# Altium PCB PCB1.PcbDoc
Units mil, origin at the board's own origin, x right, y up, seen from the top; angles counter-clockwise.
Board outline 1411.86 x 1442.8 mil, 4 copper layers (Top Layer, GND, Sign, Bottom Layer), stack 74.06 mil thick; 76 components, 64 nets, 335 pads, 393 vias.
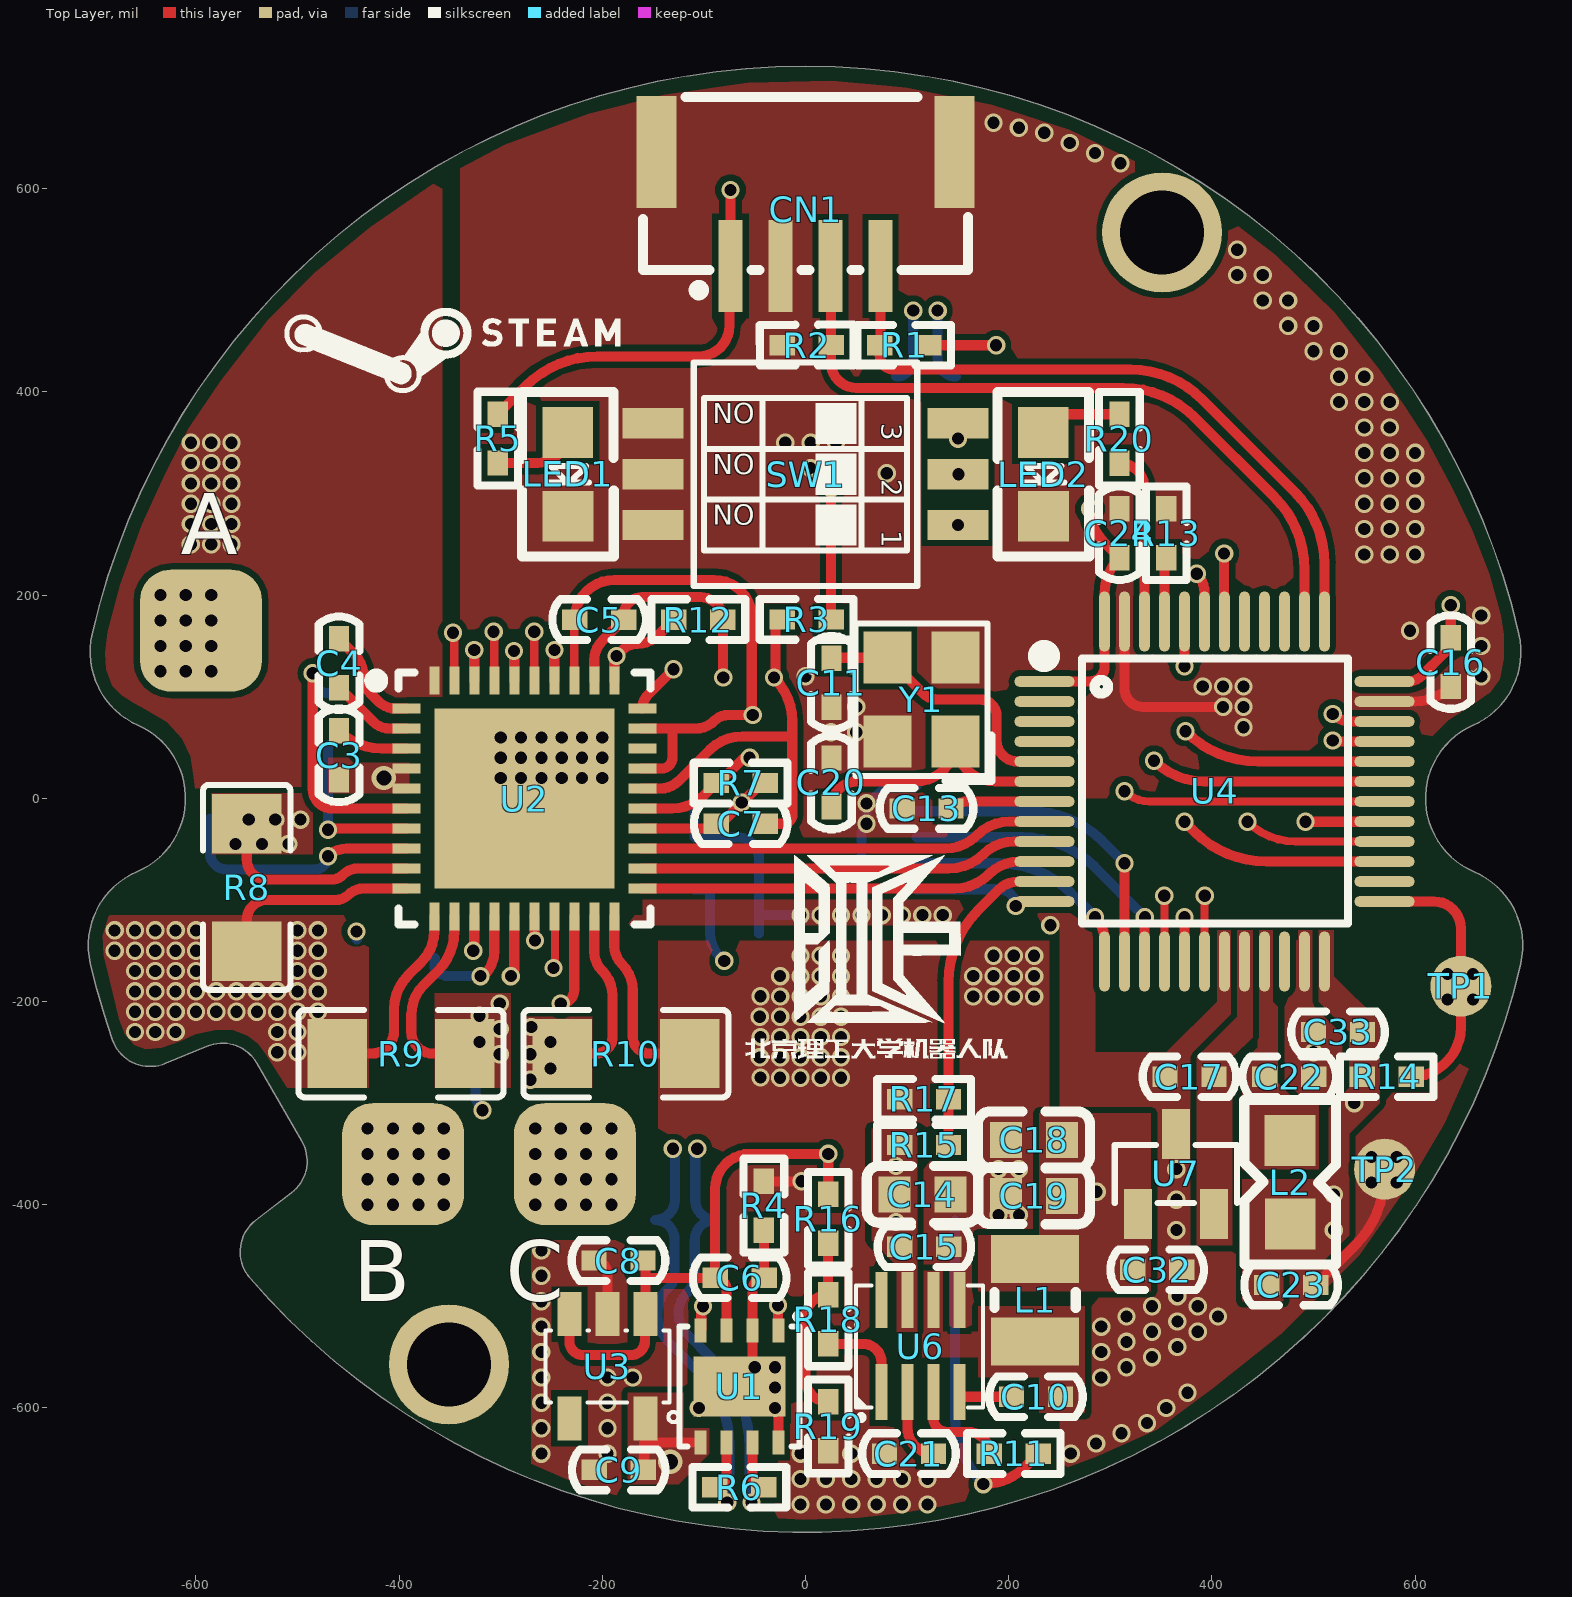
[diagram p0: Top Layer view]
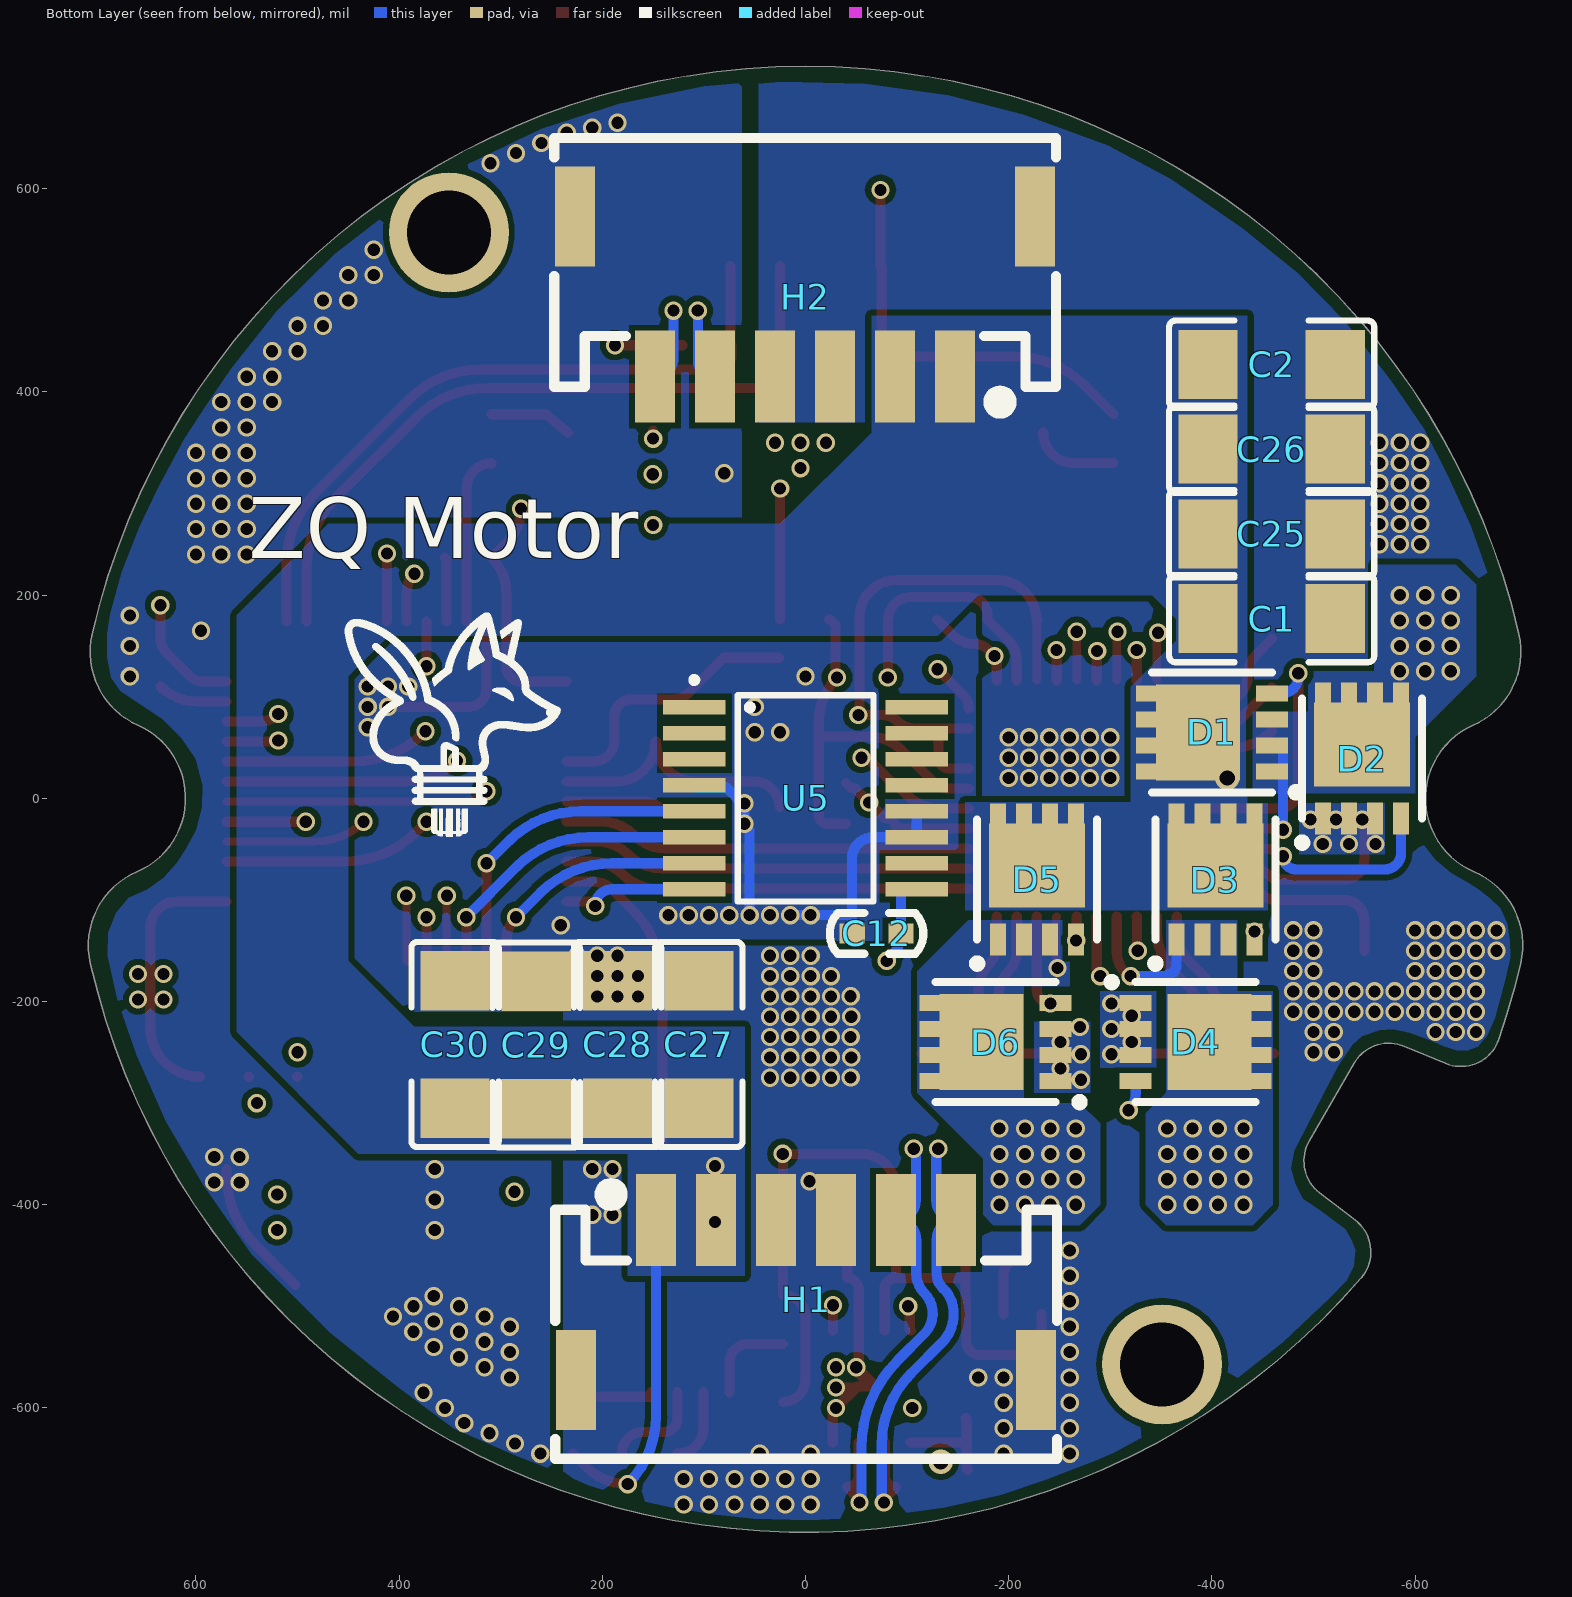
[diagram p1: Bottom Layer view, seen from below]
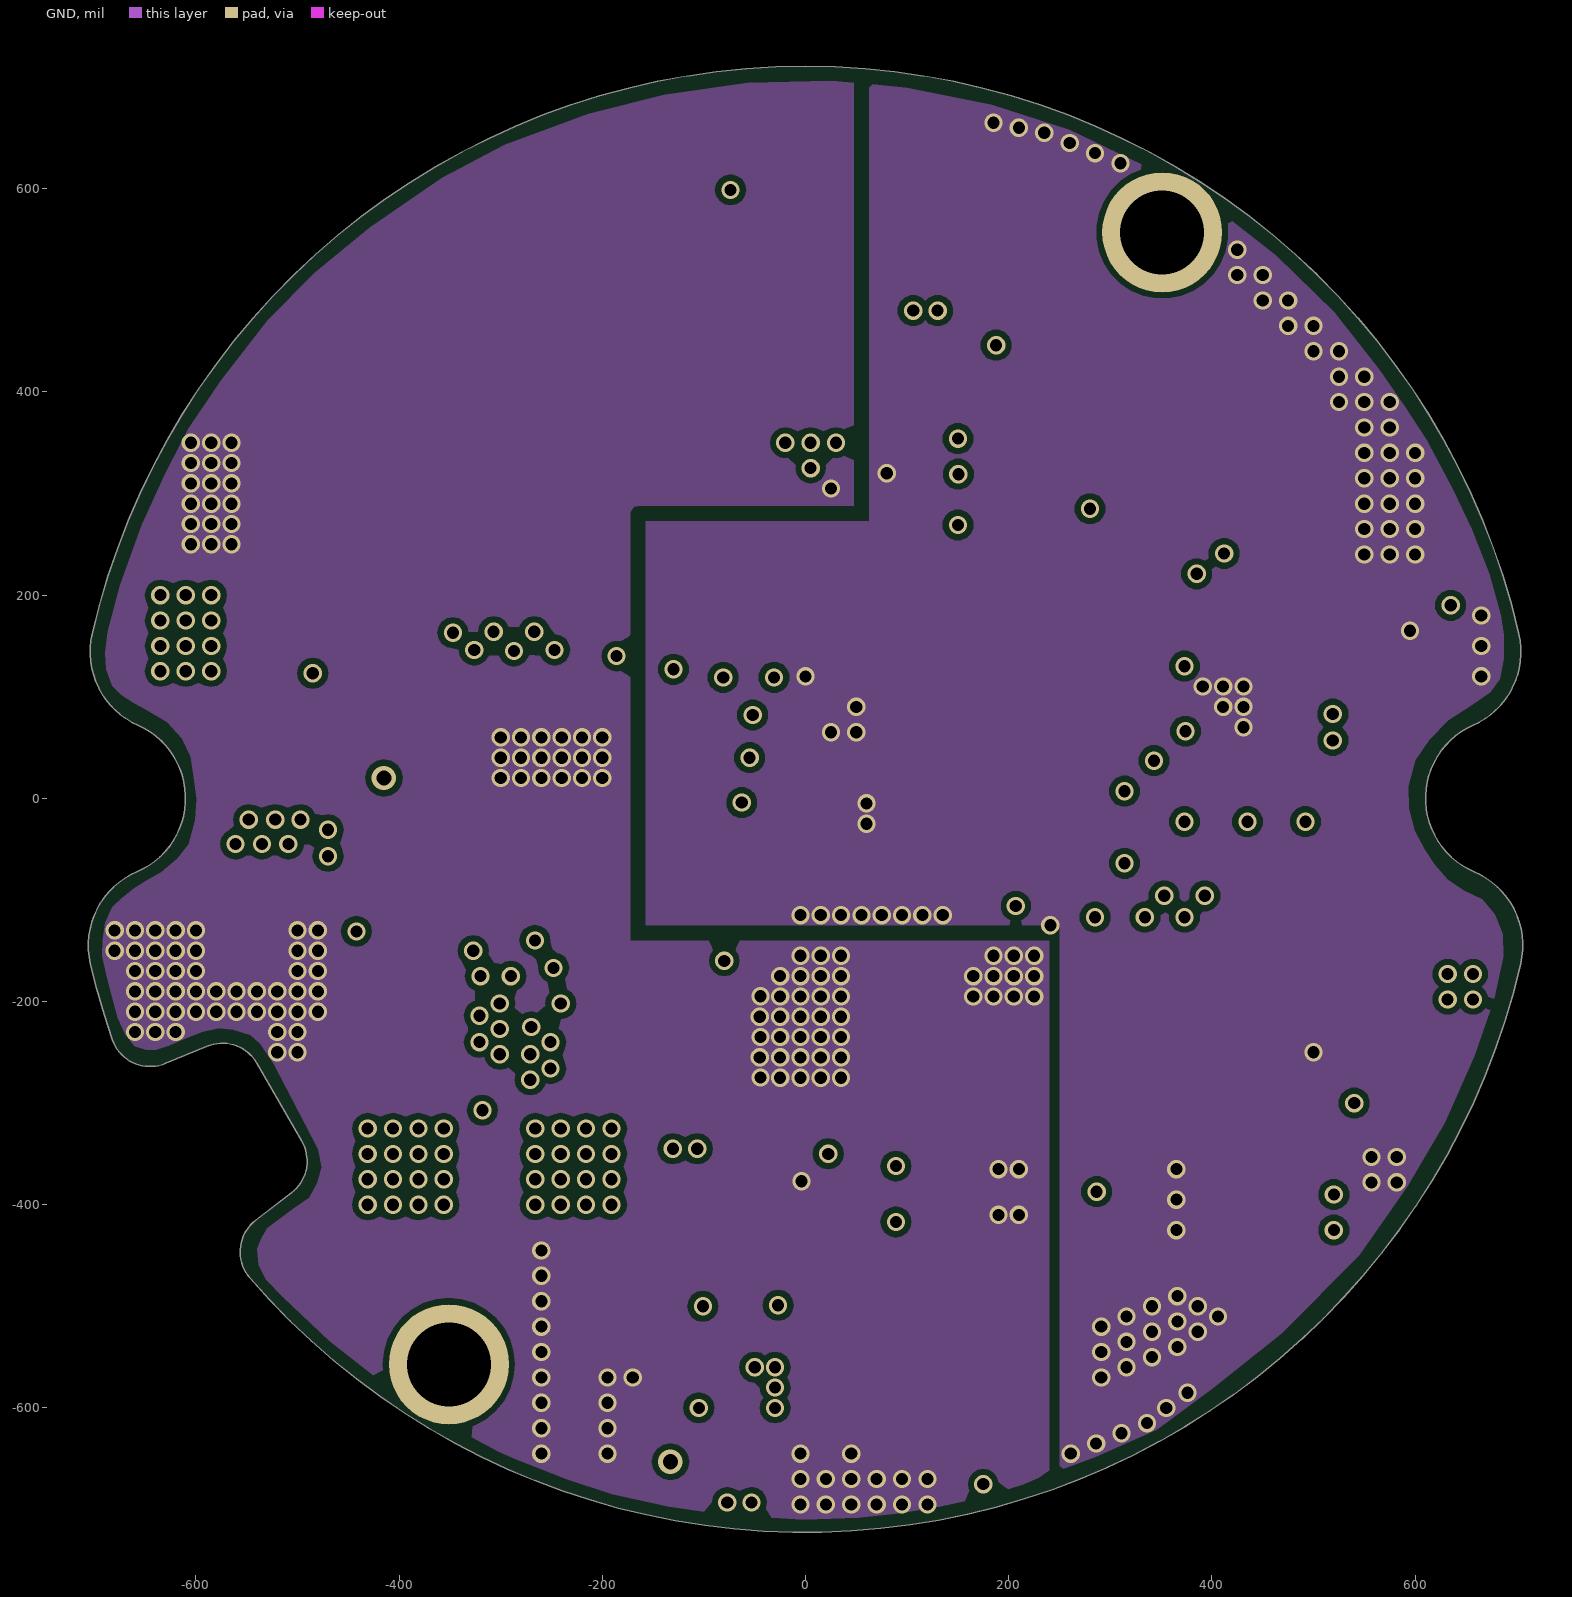
[diagram p2: GND]
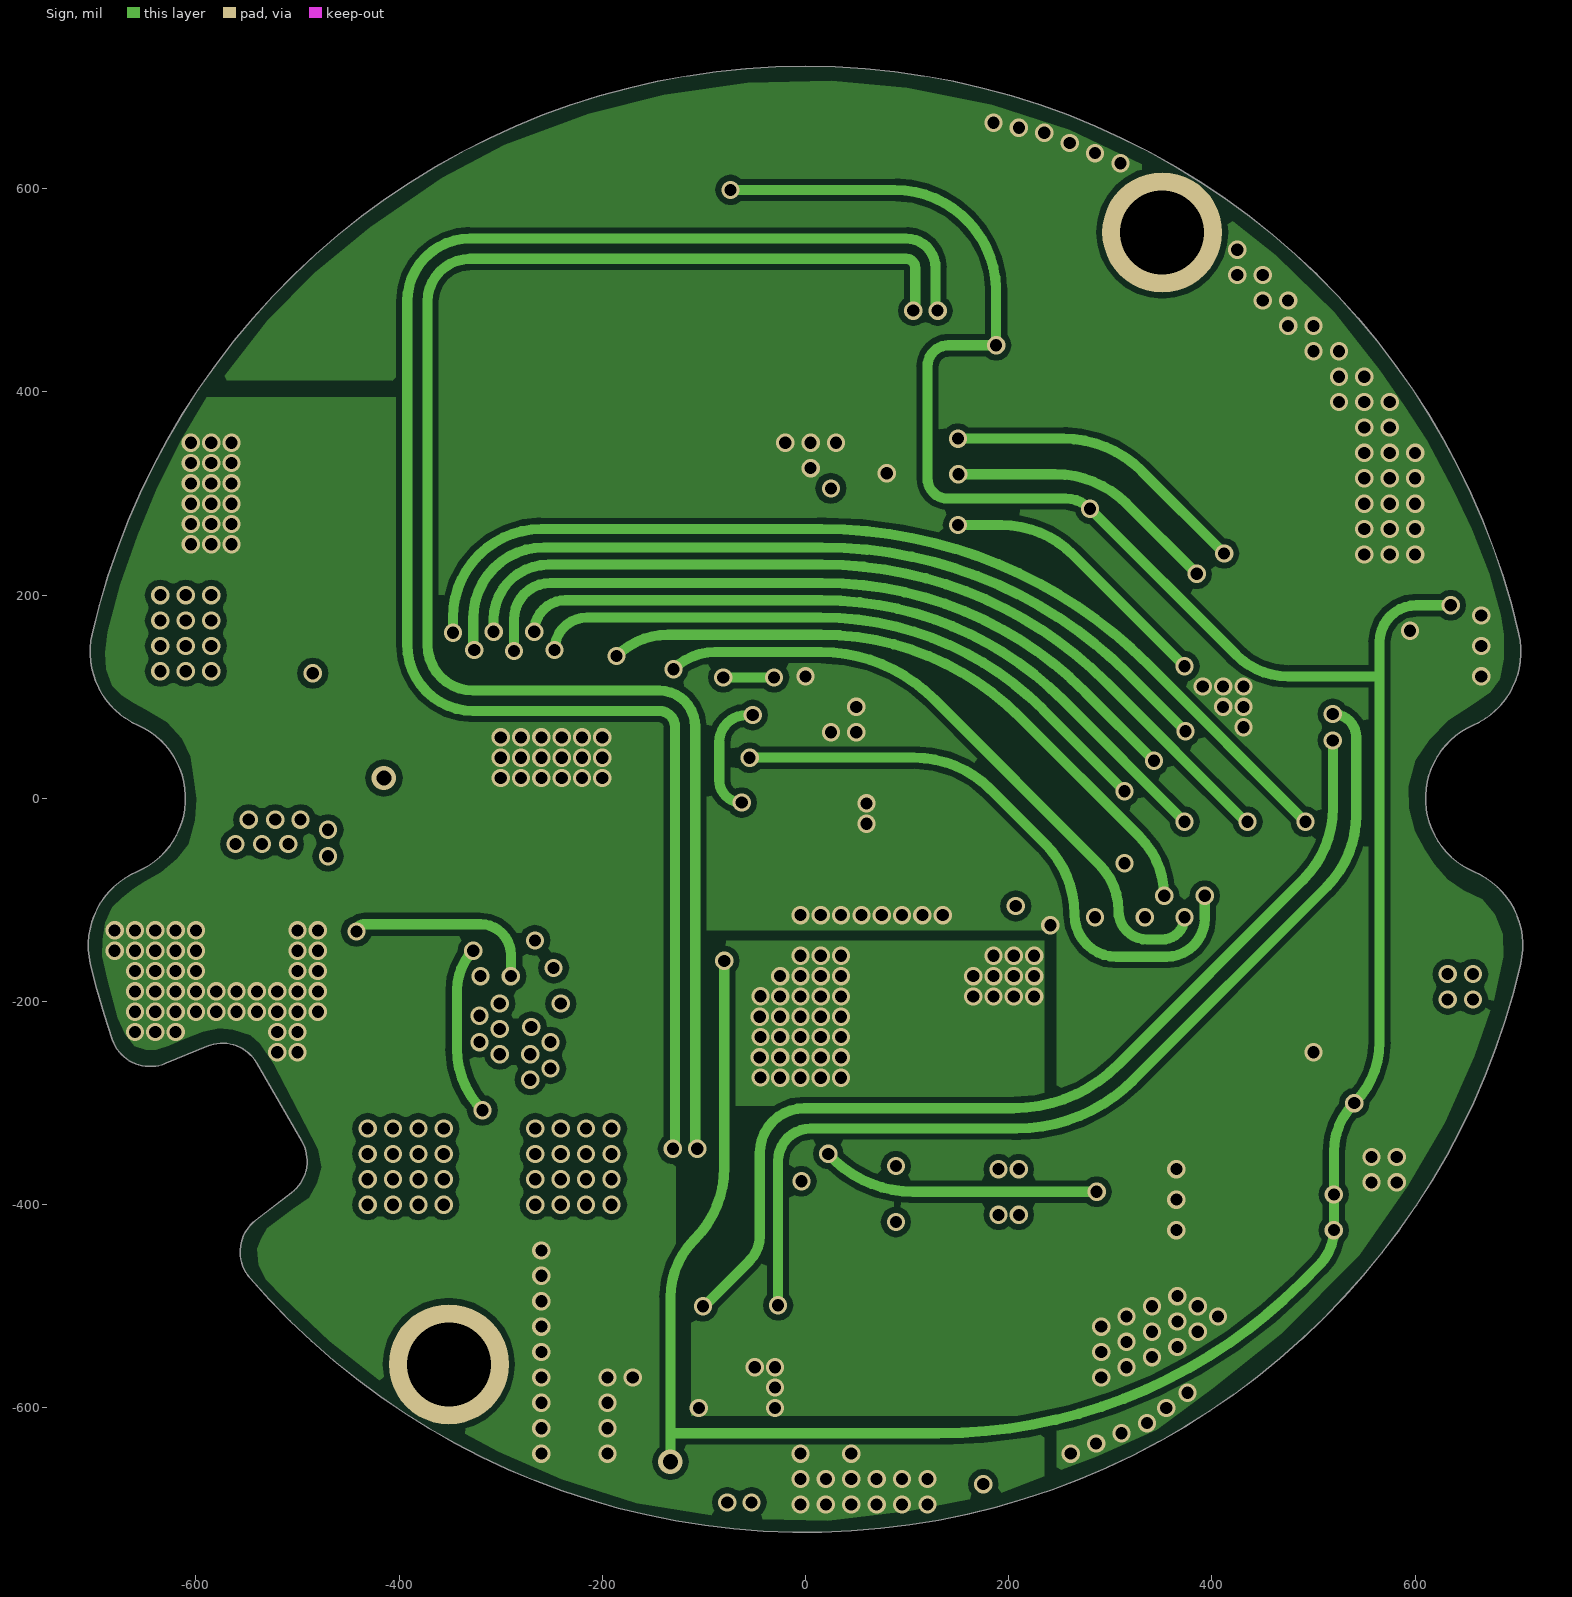
[diagram p3: Sign]
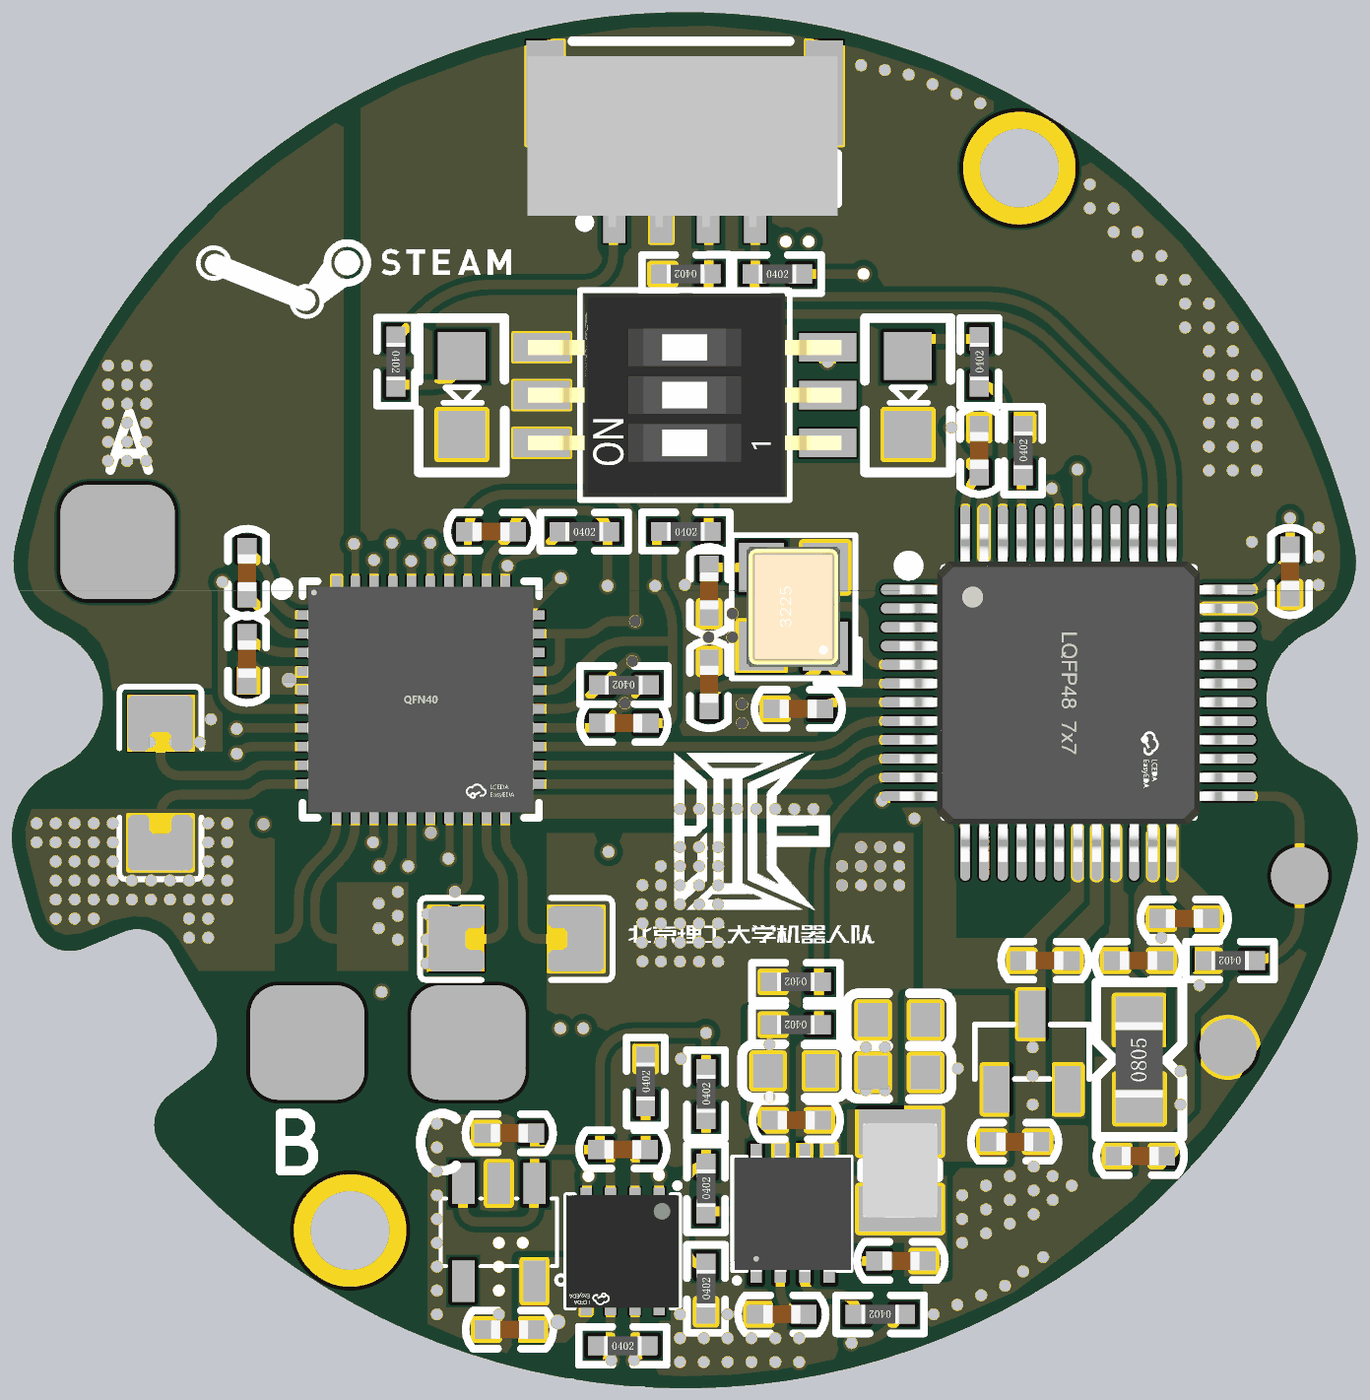
[diagram p4: 3D render of the assembled board from above, using the file's embedded part models]
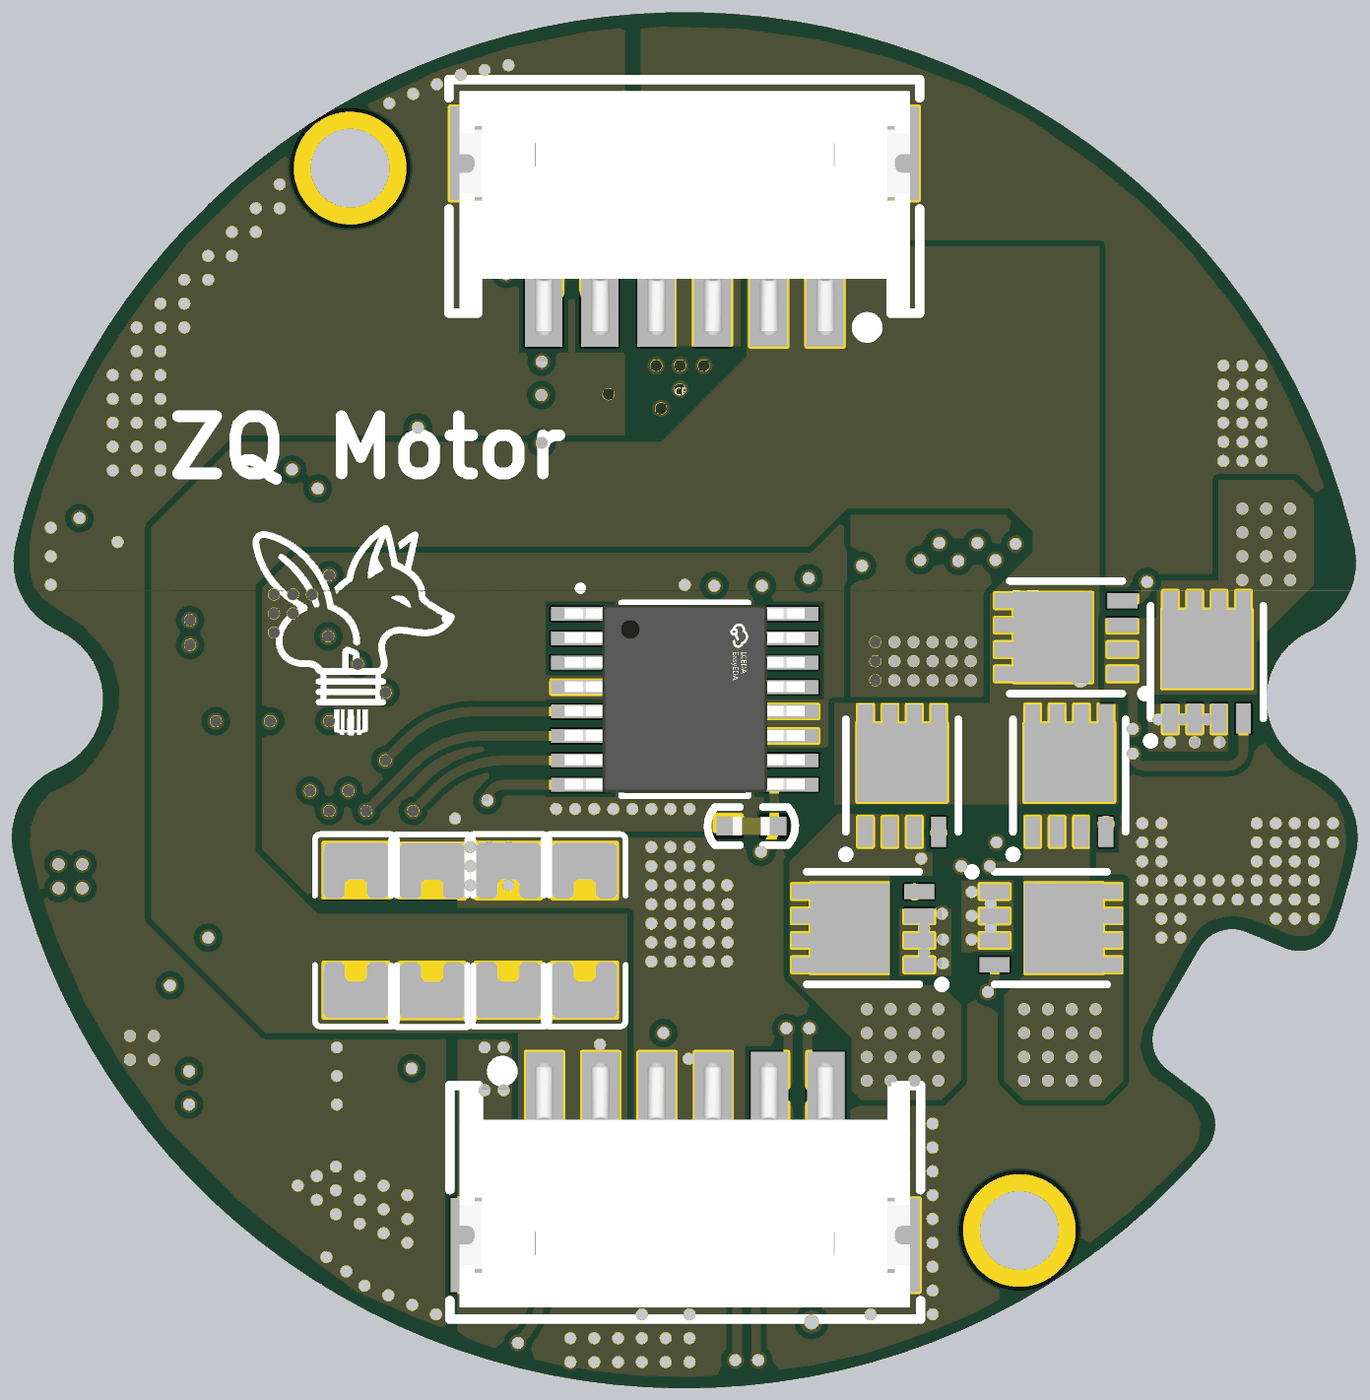
[diagram p5: 3D render of the assembled board from below, using the file's embedded part models]

## Layer stack, top to bottom
Top Solder: solder mask 0.4, Solder Resist, Dk 3.5
Top Layer: signal copper 1.4
Dielectric 2: prepreg 10.6299, PP-006, Dk 4.1
GND: signal copper 1.378
Dielectric 1: dielectric 47.244, FR-4, Dk 4.8
Sign: signal copper 1.378
Dielectric 3: prepreg 10.6299, PP-006, Dk 4.1
Bottom Layer: signal copper 1.4
Bottom Solder: solder mask 0.4, Solder Resist, Dk 3.5

## Board outline
-546.84,-472.1 cw(c-517.04,-446.38) -541.01,-415.14 -505.93,-388.23 ccw(c-529.9,-356.99) -495.81,-337.31 -540.02,-260.73 ccw(c-574.11,-280.41) -589.18,-244.04 -630.03,-260.96 cw(c-645.1,-224.58) -682.28,-237.53 cw(c0,0) -703.91,-162.57 cw(c-627.19,-144.85) -658.08,-72.43 ccw(c-688.98,0) -657.17,72.03 cw(c-625.35,144.06) -702.08,161.73 cw(c0,0) 702.08,161.73 cw(c625.35,144.06) 657.17,72.03 ccw(c688.98,0) 658.08,-72.43 cw(c627.19,-144.85) 703.91,-162.57 cw(c0,0)

## Design rules (kind name [scope] priority, off if disabled: settings)
Clearance [All] p1: gap=6 ignorepadtopadclearanceinfootprint=FALSE except(0: Arc-Hole Track-Hole SMDPad-Hole THPad-Hole Via-Hole Fill-Hole Poly-Hole Region-Hole Text-Hole)
DiffPairsRouting [All] p1: maxlimit=10 minlimit=10 mostfreqgap=10 toplayer_minwidth=8 toplayer_maxwidth=15 toplayer_prefwidth=10 midlayer1_minwidth=8 midlayer1_maxwidth=15 midlayer1_prefwidth=10 midlayer2_minwidth=8 midlayer2_maxwidth=15 midlayer2_prefwidth=10 bottomlayer_minwidth=8 bottomlayer_maxwidth=15 bottomlayer_prefwidth=10 maxuncoupledlength=500
HoleSize [All] p1: absolutevalues=TRUE maxlimit=10000 minlimit=1 maxpercent=80.000 minpercent=20.000
HoleToHoleClearance [All] p1: gap=0 allowstackedmicrovias=TRUE
MinimumSolderMaskSliver [All] p1: minsoldermaskwidth=0
PlaneClearance [All] p1: clearance=6
PlaneConnect [All] p1: planeconnectstyle=Direct reliefexpansion=20 reliefentries=4 reliefconductorwidth=10 reliefairgap=10
PolygonConnect [All] p1: connectstyle=Direct reliefconductorwidth=10 reliefentries=4 polygonreliefangle="90 Angle" airgapwidth=10
RoutingVias [All] p1: holewidth=12 width=18 viastyle="Through Hole" minholewidth=12 minwidth=18 maxholewidth=28 maxwidth=50
SilkToSilkClearance [All] p1: silktosilkclearance=0
SilkToSolderMaskClearance [IsPad] p1: minsilkscreentomaskgap=0 clearancetoexposedcopper=TRUE
SolderMaskExpansion [All] p1: expansion=4 istentingtop=FALSE
Width [All] p1: maxlimit=20 minlimit=8 preferedwidth=10
22 further rules are at their usual default settings.

## Classes and differential pairs
differential pair CAN: +CAN_P -CAN_N

## Components (designator, comment, footprint, x,y, rotation, side; value= is the part's Value field where it differs from the comment)
C1 "100uF" 1206 -1049.75,159.95 r0 bottom
C2 "100uF" 1206 -1049.75,410.11 r0 bottom
C3 "1uF" c0402 -459.14,66.35 r270 top
C4 "47nF" c0402 -459.14,156.97 r270 top
C5 "1uF" c0402 -179.05,175.88 r180 top
C6 "0.1uF" c0402 -40.8,-472 r180 top
C7 "0.1uF" c0402 -39.8,-25 r180 top
C8 "10uF" c0402 -208.2,-455 r0 top
C9 "10uF" c0402 -208,-661 r0 top
C10 "100nF" c0402 202.73,-588.97 r0 top
C11 "15pF" c0402 25.54,137.9 r270 top
C12 "100nF" C0402 -94,-133 r0 bottom
C13 "0.1uF" c0402 143.2,-10 r180 top
C14 "10uF" C0603 730.24,-301.82 r180 top
C15 "100nF" c0402 141.13,-441.45 r180 top
C16 "0.1uF" c0402 635,158.2 r270 top
C17 "0.1uF" c0402 402,-274 r180 top
C18 "10uF" C0603 -390.24,-424.25 r0 top
C19 "10uF" C0603 -390.24,-479.25 r0 top
C20 "15pF" c0402 25.54,-8.5 r90 top
C21 "100nF" c0402 77.73,-644.97 r0 top
C22 "0.1uF" c0402 500.2,-274 r180 top
C23 "0.1uF" c0402 502,-479 r180 top
C24 "0.1uF" c0402 309,236.8 r90 top
C25 "100uF" 1206 -1049.75,243.34 r0 bottom
C26 "100uF" 1206 -1049.75,326.73 r0 bottom
C27 "100uF" 1206 88.02,348.63 r270 bottom
C28 "100uF" 1206 168.02,348.63 r270 bottom
C29 "100uF" 1206 248.02,348.23 r270 bottom
C30 "100uF" 1206 328.02,348.63 r270 bottom
C32 "0.1uF" c0402 322,-464 r0 top
C33 "0.1uF" c0402 500,-230 r0 top
CN1 "卧式STLINK" CONN-SMD_4P-P1.25_GH1.25-4P 0,580 r180 top locked
D1 "NTMFS5C410NL" DFN-8_L3.0-W3.0-P0.65-BL -400,65 r90 bottom
D2 "NTMFS5C410NL" DFN-8_L3.0-W3.0-P0.65-BL -547.79,39.06 r180 bottom
D3 "NTMFS5C410NL" DFN-8_L3.0-W3.0-P0.65-BL -403.39,-80 r180 bottom
D4 "NTMFS5C410NL" DFN-8_L3.0-W3.0-P0.65-BL -384,-240 r270 bottom
D5 "NTMFS5C410NL" DFN-8_L3.0-W3.0-P0.65-BL -228,-80 r180 bottom
D6 "NTMFS5C410NL" DFN-8_L3.0-W3.0-P0.65-BL -187,-240 r90 bottom
H1 "卧式XH1.5 6PIN" CONN-SMD_6P-P1.50_ZX-ZH1.5-6PWT 0,-510 r180 bottom locked
H2 "卧式XH1.5 6PIN" CONN-SMD_6P-P1.50_ZX-ZH1.5-6PWT 0,510 r0 bottom locked
L1 "22uH" IND-SMD_L2.5-W2.0 225.93,-493.97 r270 top value=10uH
L2 "10μH" L0805 477,-419 r90 top
LED1 "LED" led0805 -234,360 r270 top
LED2 "LED" led0805 234,360 r270 top
R1 "10KΩ" R0402 73,446 r0 top
R2 "10KΩ" R0402 25.2,446.18 r180.21 top
R3 "0Ω" R0402 -23,176 r0 top
R4 "0Ω" R0402 -41,-425 r90 top
R5 "2KΩ" R0402 -303,378.2 r270 top
R6 "120Ω" R0402 -89.2,-678 r0 top
R7 "10KΩ" R0402 -39.8,15 r180 top
R8 "30mR" 1206 -566.98,-678.63 r90 top
R9 "30mR" 1206 -989.09,-234.31 r0 top
R10 "30mR" 1206 414.17,-268.28 r180 top
R11 "10KΩ" R0402 229.13,-644.97 r180 top
R12 "200KΩ" R0402 -129.55,175.88 r0 top
R13 "10KΩ" R0402 355,236.8 r90 top
R14 "2KΩ" R0402 596.2,-274 r180 top
R15 "10KΩ" R0402 140.74,-341.3 r180 top
R16 "43KΩ" R0402 22.26,-437.97 r90 top
R17 "1KΩ" R0402 140.74,-296.3 r180 top
R18 "51KΩ" R0402 22.26,-536.97 r90 top
R19 "8.2KΩ" R0402 22.26,-642.26 r90 top
R20 "2KΩ" R0402 309,329.8 r90 top
SW1 "DSHP03TSGER" SW-SMD_6P-L5.4-W5.4-P1.27-LS8.4 0,319 r90 top locked
TP1 "testpoint" testpoint 645,-185 r270 top
TP2 "testpoint" testpoint 570,-365 r0 top
U1 "SIT1057QTK/3" DFN-8_L3.0-W3.0-P0.65-BL-EP -65.1,-578.97 r180 top
U2 "DRV8323HRTAR" QFN-40_L6.0-W6.0-P0.50-BL-EP4.5 -276.83,-0.24 r270 top
U3 "XC6201P332MR-HXY" SOT-23-5_L3.0-W1.7-P0.95-LS2.8-BR -195,-559 r90 top
U4 "STM32G474CET6_1" LQFP-48_L7.0-W7.0-P0.50-LS9.0-BL 402.54,6.7 r270 top
U5 "MT6825GT-STD" TSSOP-16_L5.0-W4.4-P0.65-LS6.4-BL-1 0,0 r270 bottom locked
U6 "MP9943" "QFN-8 3x3" 74.75,-584.52 r90 top
U7 "REF3133AIDBZR" SOT-23-3_L2.9-W1.3-P1.90-LS2.4-BR 519.31,-150.65 r270 top
Y1 "3225贴片晶振" OSC-3225-4P 114,97.04 r90 top value=16M

## Footprints (in the part's own frame and the unit in brackets; to place one, negate y for a bottom-side part, rotate by r counter-clockwise, add the part's x,y. Pads: shape width x height; smd on the part's side, far side on the other; paste and mask are expansions set on the pad)
1206 [mm]
  rect 1.485x1.728 smd paste-100 mask+0.051: 1(13.417,-0.431) 2(16.602,-0.431)
  silkscreen extent 12.45,-1.52 17.57,0.66, body extent 13.41,-1.24 16.61,0.38, height 1.11
c0402 [mil]
  rect 25x20 smd: 1(0,0) 2(48.2,0)
  silkscreen extent -22,-20 70,20, body extent 5,-10 44,10, height 20
C0402 [mil]
  rect 25x20 smd: 1(0,0) 2(48.2,0)
  silkscreen extent -22,-20 70,20, body extent 5,-10 44,10, height 20
C0603 [mm]
  rect 0.8x0.9 smd: 1(14.93,2.234) 2(16.33,2.234)
  silkscreen extent 14.22,1.52 17.02,2.95, body extent 14.82,1.84 16.42,2.64, height 0.78
CONN-SMD_4P-P1.25_GH1.25-4P [mm]
  rect 0.6x2.3 smd mask+0.051: 1(1.875,1.425) 2(0.625,1.425) 3(-0.625,1.425) 4(-1.875,1.425)
  rect 1x2.8 smd mask+0.051: 5(-3.725,-1.425) 6(3.725,-1.425)
  silkscreen extent -4.06,-2.8 4.06,2.16, body extent -4.07,-2.4 4.19,2.15, height 4.13
CONN-SMD_6P-P1.50_ZX-ZH1.5-6PWT [mm]
  rect 1x2.3 smd paste+0 mask+0.05: 1(-3.738,2.413) 2(-2.238,2.413) 3(-0.738,2.413) 4(0.762,2.413) 5(2.262,2.413) 6(3.762,2.413)
  rect 1x2.5 smd paste+0 mask+0.05: 7(5.762,-1.587) 8(-5.738,-1.587)
  silkscreen extent -6.26,-3.56 6.28,3.46, body extent -6,-3.25 6.01,3.25, height 3.78
DFN-8_L3.0-W3.0-P0.65-BL [mm]
  rect 0.4x0.8 smd paste-100 mask+0.051: D(-0.975,1.5) D(-0.325,1.5) D(0.325,1.5) D(0.975,1.5) G(0.975,-1.5) S(-0.975,-1.5) S(-0.325,-1.5) S(0.325,-1.5)
  rect 2.4x2.1 smd paste-100 mask+0.051: D(0,0.35)
  silkscreen extent -1.6,-2.2 1.5,1.5, body extent -1.55,-1.6 1.55,1.6, height 0.8
DFN-8_L3.0-W3.0-P0.65-BL-EP [mm]
  rect 0.3x0.6 smd paste+0 mask+0.05: 1(-0.975,-1.4) 2(-0.325,-1.4) 3(0.325,-1.4) 4(0.975,-1.4) 5(0.975,1.4) 6(0.325,1.4) 7(-0.325,1.4) 8(-0.975,1.4)
  rect 2.3x1.5 smd paste+0 mask+0.05: 9(0,0)
  silkscreen extent -1.51,-1.8 1.5,1.5, body extent -1.5,-1.5 1.5,1.5, height 1.01
IND-SMD_L2.5-W2.0 [mm]
  rect 1.2x2.2 smd: 1(1.028,0) 2(-1.028,0)
  silkscreen extent -0.2,-1.02 0.2,1.02, body extent -1.26,-1 1.26,1, height 1.2
L0805 [mil]
  rect 50x50 smd: 1(0,0) 2(82.3,0.2)
  silkscreen extent -40,-45 122,45, body extent 1,-24 80,25, height 22
led0805 [mil] "1/8W"
  rect 50x50 smd: 1(0,0) 2(82.3,0.2)
  silkscreen extent -40,-45 122,45, body extent 2,-25 80,25, height 20
LQFP-48_L7.0-W7.0-P0.50-LS9.0-BL [mm]
  oval 0.27x1.5 smd paste+0 mask+0.05: 1(-2.75,-4.25) 2(-2.25,-4.25) 3(-1.75,-4.25) 4(-1.25,-4.25) 5(-0.75,-4.25) 6(-0.25,-4.25) 7(0.25,-4.25) 8(0.75,-4.25) 9(1.25,-4.25) 10(1.75,-4.25) 11(2.25,-4.25) 12(2.75,-4.25) 25(2.75,4.25) 26(2.25,4.25) 27(1.75,4.25) 28(1.25,4.25) 29(0.75,4.25) 30(0.25,4.25) 31(-0.25,4.25) 32(-0.75,4.25) 33(-1.25,4.25) 34(-1.75,4.25) 35(-2.25,4.25) 36(-2.75,4.25)
  oval 1.5x0.27 smd paste+0 mask+0.05: 13(4.25,-2.75) 14(4.25,-2.25) 15(4.25,-1.75) 16(4.25,-1.25) 17(4.25,-0.75) 18(4.25,-0.25) 19(4.25,0.25) 20(4.25,0.75) 21(4.25,1.25) 22(4.25,1.75) 23(4.25,2.25) 24(4.25,2.75) 37(-4.25,2.75) 38(-4.25,2.25) 39(-4.25,1.75) 40(-4.25,1.25) 41(-4.25,0.75) 42(-4.25,0.25) 43(-4.25,-0.25) 44(-4.25,-0.75) 45(-4.25,-1.25) 46(-4.25,-1.75) 47(-4.25,-2.25) 48(-4.25,-2.75)
  silkscreen extent -3.59,-4.46 3.3,3.34, body extent -4.5,-4.5 4.5,4.5, height 1.45
OSC-3225-4P [mm] "3.2*2.5*0.7mm(长宽高)                             淘宝ID:黄晶宝石"
  rect 1.3x1.2 smd: 1(-1.05,-0.85) 2(1.05,-0.85) 3(1.05,0.85) 4(-1.05,0.85)
  silkscreen extent -2.03,-1.75 1.91,1.65, body extent -1.6,-1.25 1.6,1.25, height 0.7
"QFN-8 3x3" [mm]
  rect 1.4x0.3 smd: 1(0,0) 2(0,-0.65) 3(0,-1.3) 4(0,-1.95) 5(2.3,-1.95) 6(2.3,-1.3) 7(2.3,-0.65) 8(2.3,0)
  silkscreen extent -0.64,-2.54 2.67,0.64, body extent -0.41,-2.53 2.69,0.57, height 0.94
QFN-40_L6.0-W6.0-P0.50-BL-EP4.5 [mm]
  rect 0.25x0.7 smd paste-100 mask+0.051: 1(-2.25,-2.95) 2(-1.75,-2.95) 3(-1.25,-2.95) 4(-0.75,-2.95) 5(-0.25,-2.95) 6(0.25,-2.95) 7(0.75,-2.95) 8(1.25,-2.95) 9(1.75,-2.95) 10(2.25,-2.95) 21(2.25,2.95) 22(1.75,2.95) 23(1.25,2.95) 24(0.75,2.95) 25(0.25,2.95) 26(-0.25,2.95) 27(-0.75,2.95) 28(-1.25,2.95) 29(-1.75,2.95) 30(-2.25,2.95)
  rect 0.7x0.25 smd paste-100 mask+0.051: 11(2.95,-2.25) 12(2.95,-1.75) 13(2.95,-1.25) 14(2.95,-0.75) 15(2.95,-0.25) 16(2.95,0.25) 17(2.95,0.75) 18(2.95,1.25) 19(2.95,1.75) 20(2.95,2.25) 31(-2.95,2.25) 32(-2.95,1.75) 33(-2.95,1.25) 34(-2.95,0.75) 35(-2.95,0.25) 36(-2.95,-0.25) 37(-2.95,-0.75) 38(-2.95,-1.25) 39(-2.95,-1.75) 40(-2.95,-2.25)
  rect 4.5x4.5 smd paste-100 mask+0.051: 41(0,0)
  silkscreen extent -3.15,-3.85 3.15,3.15, body extent -3.01,-3.01 3.01,3.01, height 0.83
R0402 [mil] "1/16W"
  rect 25x20 smd: 1(0,0) 2(48.2,0)
  silkscreen extent -22,-20 70,20, body extent 5,-10 44,10, height 14
SOT-23-3_L2.9-W1.3-P1.90-LS2.4-BR [mm]
  rect 1.25x0.7 smd: 1(6.562,-4.885) 2(6.562,-2.985) 3(4.562,-3.935)
  silkscreen extent 4.84,-5.46 6.29,-2.41, body extent 4.19,-5.39 6.99,-2.49, height 1.3
SOT-23-5_L3.0-W1.7-P0.95-LS2.8-BR [mm]
  rect 1.1x0.6 smd: 1(1.3,-0.95) 2(1.3,0) 3(1.3,0.95) 4(-1.3,0.95) 5(-1.3,-0.95)
  silkscreen extent -1.4,-1.78 0.9,1.55, body extent -1.5,-1.5 1.5,1.5, height 1.3
SW-SMD_6P-L5.4-W5.4-P1.27-LS8.4 [mil]
  rect 30x60 smd paste+0 mask+2: 1(-50,-150) 2(0,-150) 3(50,-150) 4(50,150) 5(0,150) 6(-50,150)
  silkscreen extent -110,-110 110,110, body extent -106,-164 106,164, height 91
testpoint [mil]
  round 60 smd: 1(0,0)
TSSOP-16_L5.0-W4.4-P0.65-LS6.4-BL-1 [mm]
  rect 0.364x1.56 smd paste+0 mask+0.051: 1(-2.275,-2.78) 2(-1.625,-2.78) 3(-0.975,-2.78) 4(-0.325,-2.78) 5(0.325,-2.78) 6(0.975,-2.78) 7(1.625,-2.78) 8(2.275,-2.78) 9(2.275,2.78) 10(1.625,2.78) 11(0.975,2.78) 12(0.325,2.78) 13(-0.325,2.78) 14(-0.975,2.78) 15(-1.625,2.78) 16(-2.275,2.78)
  silkscreen extent -3.03,-2.85 2.58,1.7, body extent -2.51,-3.2 2.49,3.2, height 1.09

## Part data
C1 C2 C14 C18 C19 C25 C26 C27 C28 C29 C30: library part 1210贴片电容, "1210贴片电容"
C3 C4 C5 C6 C7 C8 C9 C10 C11 C12 C13 C15 C16 C17 C20 C21 C22 C23 C24 C32 C33: library part 0402贴片电容, "贴片电容0402"
D1 D2 D3 D4 D5 D6: "N沟道MOS管", ComponentLink1Description="Manufacturer Link", ComponentLink1URL=http://www.irf.com/, DatasheetVersion=PD-9.814, LatestRevisionDate=17-Jul-2002, LatestRevisionNote="Re-released for DXP Platform.", Note="Pin 2 is electrically connected to pin 4.", PackageDescription="TO, Thru-Hole, Vertical, Heatsink Mounted; 3 In-Line Leads; Pitch 2.54 mm", PackageReference=TO-220AB, PackageVersion=Feb-1997, Published=8-Jun-2000, Publisher="Altium Limited"
L1: library part 0530屏蔽电感, "一体成型屏蔽电感，0530封装，额定电流3A", DC Resistance (DCR)=125mΩ, JLCPCB Part Class="Extended Part", LCSC Part Name="10uH ±20% 3.5A", Manufacturer=XR(祥如), Manufacturer Part=XR0530-100M, Rated Current=3.2A, Saturation Current (Isat)=3.5A, Tolerance=±20%, Add into BOM=yes, Convert to PCB=yes, Datasheet=https://atta.szlcsc.com/upload/public/pdf/source/20240328/42FE63A3232C4AF7EB8F1CDEDD5FC69F.pdf, Device=XR0530-100M, Supplier=LCSC, Supplier Footprint=SMD,0530, Supplier Part=C5307602, Symbol=XR0530-100M, Type=一体成型电感
L2: library part 0805贴片电感, "0805贴片电感"
LED1 LED2: library part 0805贴片LED, "0805贴片LED"
R1 R2 R3 R4 R5 R6 R7 R11 R12 R13 R14 R15 R16 R17 R18 R19 R20: library part 0402贴片电阻, "0402贴片电阻"
R8 R9 R10: library part 2512检流电阻, "2512检流电阻"
U2: JLCPCB Part Class="Extended Part", LCSC Part Name="5mA 无刷直流BLDC电机驱动芯片 60V", Manufacturer=TI(德州仪器), Add into BOM=yes, Convert to PCB=yes, Datasheet=https://www.ti.com/cn/lit/gpn/drv8323, Device=DRV8323HRTAR, Manufacturer Part=DRV8323HRTAR, Supplier=LCSC, Supplier Footprint=QFN-40-EP(6x6), Supplier Part=C701783, Symbol=DRV8323HRTAR
U3: "3.3V LDO", JLCPCB Part Class="Extended Part", Manufacturer="HXY MOSFET(华轩阳电子)", MAX Output Current=300mA, Maximum Input Voltage=12V, Output Voltage=3.3V, Add into BOM=yes, Convert to PCB=yes, Datasheet=https://atta.szlcsc.com/upload/public/pdf/source/20231208/3D7EFECB06481ED5AED4680614D7FFF5.pdf, Device=XC6201P332MR-HXY, LCSC Part Name=XC6201P332MR-HXY, Manufacturer Part=XC6201P332MR-HXY, Output Polarity=正极, Output Type=固定, Supplier=LCSC, Supplier Footprint=SOT-23-5L, Supplier Part=C19626990, Symbol=XC6201P332MR-HXY
U5: "18位绝对角编码器"

## Free pads (board coordinates)
  round 118.11 hole 82.68: 4(-351.07,-557.07) 6(351.07,557.07)
  rrect50% 120x120 smd: 14(-595,165) 14(-396,-360) 14(-227,-360)

## Via types
v1: diameter 18, hole 12, Top Layer to Bottom Layer, tented both sides, 391 vias
v2: diameter 24, hole 15, Top Layer to Bottom Layer, tented both sides, 2 vias

## Nets (pads, with @x,y where several pads share a name; then routed paths per layer and width w, separated by ;. In a path a pad name is that pad's centre, name@x,y a point inside that pad or via, vN(x,y) a via of type N, cw(c..) or ccw(c..) an arc to the next point about the centre after c; other vN are vias at no path point)
3V3: C9.2 C12.1 C16.1 C23.2 C24.1 C33.2 CN1.1 L2.1 R1.2 R5.1 R14.2 U1.5 U3.5 U4.1 U4.24 U4.36 U4.48 U5.9 | length 4014.5
  Top Layer w10: R5.1 -275.49,405.71 cw(c-204.78,335) -204.78,435 -105,435 ccw(c-105,465) -75,465 -75,522.72 cw(c-73.82,522.72) CN1.1 v1(-73.82,598.82) ; C9.2 -158.7,-659.9 -158.7,-634 -158.61,-634.09 ; U3.5 -158.61,-611.19 -158.61,-634.09 ; U1.5 -158.61,-634.09 ; R1.2 v1(187.59,446) ; U4.1 279.97,114.97 ccw(c279.97,129.27) 294.27,129.27 U4.48 294.27,201.11 cw(c344.56,201.24) 304,230.97 C24.1 293.58,252.22 cw(c326.35,285) 285.86,262.44 cw(c326.35,285) v1(280,285) ; R14.2 R14.2@548.2,-273.8 ; U4.36 592.45,114.97 ccw(c592.45,135.55) 607,121 ; 607,121 628.49,142.49 ccw(c612.79,158.2) C16.1 v1(635,190)
  Sign w10: v2(-133,-653) -133,-625 ; v1(-80,-160) -80,-363.58 cw(c-180,-363.58) -109.29,-434.29 ccw(c-52.05,-491.53) -133,-491.53 -133,-625 ; v1(-73.82,598.82) 87.59,598.82 cw(c87.59,498.75) 187.59,502.42 v1(187.59,446) 141,446 ccw(c141,425) 120,425 120,315 ccw(c140,315) 140,295 255.86,295 cw(c255.86,260.86) v1@280,285 ; v1(280,285) 423.79,141.21 ccw(c475,192.43) 475,120 565,120 ; 565,84.16 565,-239.64 cw(c479.64,-239.64) 540.04,-299.96 cw(c479.64,-239.64) v1(540,-300) ccw(c588.28,-348.28) 520,-348.28 v1(520,-390) v1(520,-425) cw(c471.72,-425) 505.86,-459.14 487.82,-477.18 cw(c131.01,-120.44) 130.94,-625 -133,-625 ; 565,84.2 565,120 ; v1(635,190) 601.42,190 ccw(c601.42,153.58) 565,153.58 565,120
  Bottom Layer w10: U5.9 -96.17,-89.57 -94,-91.73 C12.1 ccw(c-62.62,-133) -84.81,-155.19 v1(-80,-160)
5V: C6.2 C8.2 C18.2 C19.2 C32.1 L1.2 R16.2 U1.3 U3.1 U3.3 U7.1 | length 857.7
  Top Layer w10: U3.3 -232.4,-534.6 ccw(c-219,-534.6) -219,-548 -172,-548 ccw(c-172,-534) -158,-534 -158,-492 -157.6,-492 -157.6,-472 ; C8.2 cw(c-160,-457.4) -157.6,-457.4 -157.6,-472 ; U1.3 -77.89,-483.11 ccw(c-89,-483.11) C6.2 ; R16.2 22.34,-389.7 22.34,-350.02 v1(22.42,-349.94) -54.41,-349.94 ccw(c-54.41,-384.53) -89,-384.53 C6.2 ; -157.6,-472 C6.2
  Sign w10: v1(22.42,-349.94) 22.49,-350.02 ccw(c105.93,-274.97) 106.08,-387.2 v1(286.52,-387.2)
ADC1_NTC: R14.1 TP1.1 U4.25 | length 264.1
  Top Layer w10: U4.25 618.57,-101.57 cw(c618.57,-128) 645,-128 TP1.1 645,-225.2 cw(c596.2,-225.2) R14.1
  other v1: 632,-198 657,-198 632,-173 657,-173
ADC1_VCC: R15.1 R17.1 U4.11 | length 314.8
  Top Layer w10: R15.1 R17.1 140.74,-180.68 cw(c240.74,-180.68) 170.03,-109.97 190,-90 cw(c209.61,-109.61) 209.61,-81.88 U4.11
AGND: C5.1 C7.1 R3.1 R12.2 U2.26 U2.32 | length 701.5
  Top Layer w10: U2.32 -207.93,135.86 cw(c-180.86,135.86) -200,155 -179.12,175.88 C5.1 -179.05,179.95 cw(c-161,179.95) -161,198 -103.47,198 cw(c-103.47,175.88) R12.2 -81.18,175.7 -81.18,119.18 v1(-81,119) ; U2.26 -143,9.6 ccw(c-143,35.18) -124.92,17.08 -94.48,47.52 cw(c-62,15.13) -62,61 -13,61 ; C7.1 -21.63,-25 ccw(c-21.63,-16.37) -13,-16.37 -13,61 ; R3.1 -24.47,176 -29.47,171 -29.47,120.53 v1(-31,119) cw(c-74.46,75.54) -13,75.54 -13,61
  Sign w10: v1(-81,119) v1(-31,119)
CAN_N: H1.6 H2.6 R6.1 U1.6 | length 2225.1
  Top Layer w10: U1.6 -77.89,-666.69 cw(c-89.2,-666.69) R6.1 -79.15,-688.05 cw(c-84.1,-693) v1(-77.1,-693)
  Sign w10: v1@-130,-345 v1(-130.58,-345) ccw(c-130.58,-343) -128.58,-343 -128.58,70.58 ccw(c-144,70.58) -144,86 -327,86 cw(c-327,151) -392,151 -392,489 cw(c-330,489) -330,551 99,551 cw(c99,522) 128,522 128,482 ccw(c130,482) v1(130,480)
  Bottom Layer w10: v1(-130.58,-345) cw(c-130.58,-347) -128.58,-347 -128.58,-395.47 cw(c-148.11,-395.47) H1.6 cw(c-148.11,-434.11) -129,-434.11 -129,-468 cw(c-148.31,-468) -134.66,-481.66 ccw(c-113.24,-505.9) -145.57,-504.91 ccw(c-107.33,-508.37) -134.48,-535.52 -104.29,-565.71 cw(c-175,-636.42) -75,-636.42 -75,-687.93 cw(c-82.17,-687.93) v1(-77.1,-693) ; v1(-77.1,-693) v1@-77.1,-692.77 ; v1(130,480) 130,433.11 ccw(c148.11,433.11) H2.6
CAN_P: H1.5 H2.5 R6.2 U1.7 | length 2165.5
  Top Layer w10: v1(-53.1,-693) cw(c-46.1,-693) -51.05,-688.05 R6.2 cw(c-41,-666.7) -52.3,-666.7 U1.7
  Sign w10: v1@-110,-341.58 ccw(c-106.58,-341.58) v1(-106.58,-345) cw(c-106.58,-343) -108.58,-343 -108.58,70.58 ccw(c-144,70.58) -144,106 -327,106 cw(c-327,151) -372,151 -372,489 cw(c-330,489) -330,531 99,531 cw(c99,522) 108,522 108,482 cw(c106,482) v1(106,480)
  Bottom Layer w10: v1(-106.58,-345) ccw(c-106.58,-347) -108.58,-347 -108.58,-395.47 ccw(c-89.05,-395.47) H1.5 ccw(c-89.05,-434.95) -109,-434.95 -109,-468 cw(c-135.56,-468) -116.77,-486.77 ccw(c-96.51,-507.05) -118.16,-525.84 -90.86,-553.14 cw(c-177.42,-639.71) -55,-639.71 -55,-688.41 ccw(c-48.51,-688.41) v1(-53.1,-693) ; H2.5 ccw(c89.06,431.95) 106,431.95 v1(106,480)
DGND: C6.1 C11.2 C12.2 C13.2 C16.2 C17.2 C20.2 C22.1 C23.1 C24.2 C32.2 C33.1 CN1.2 CN1.5 CN1.6 H2.7 LED1.2 LED2.2 R2.2 R4.1 R13.2 SW1.4 SW1.5 SW1.6 TP2.1 U1.2 U1.8 U1.9 U4.19 U4.23 U4.35 U4.47 U5.4 U5.11 U5.12 U7.3 Y1.2 Y1.4 | length 1076.9
  Top Layer w10: v1(-50,-560) -65.1,-575.1 U1.9 ; R4.1 C6.1@-41,-472 ; C6.1 C6.1@-41,-472 ; U1.9@-32.61,-602.61 -27.61,-602.61 -26.71,-603.5 U1.8 ; v1(-30,-600) U1.9@-50,-580 ; v1(-30,-580) U1.9@-50,-580 ; U4.47 313.96,108.04 ccw(c332,108.04) 332,90 v1(411,90) ; C22.1@500,-273.8 C22.1 ; C23.1 540.71,-440.29 ccw(c470,-369.58) 570,-369.58 TP2.1 ; U4.35 599.46,95.28 ccw(c599.46,145.54) C16.2 ; U1.9 -51.03,-578.97 U1.9@-50,-580 ; U1.9 -52.3,-566.18 -52.3,-483.5 cw(c-40.8,-483.5) C6.1@-41,-472
  Bottom Layer w10: U5.12 U5.11 -66.61,-38.39 cw(c-66.61,-59.2) -45.8,-59.2 -45.8,-115 ; C12.2 -45.8,-115 ; v1(15,-115) v1(-5,-115) -45.8,-115 ; v1(55,-115) 55,-32.16 60,-27.16 v1(60,-5) 62.16,-5 77.79,10.63 107.28,10.63 U5.4
  other v1: 261,-645 286,-635 311,-625 336,-615 -105,-600 355,-600 376,-585 291,-570 -30,-560 316,-560 341,-550 291,-545 366,-540 316,-535 341,-525 386,-525 291,-520 366,-515 316,-510 406,-510 341,-500 386,-500 366,-490 365,-425 365,-395 557,-378 582,-378 365,-365 557,-353 582,-353 500,-250 241,-125 35,-115 75,-115 95,-115 115,-115 135,-115 60,-25 25,65 50,65 431,70 50,90 431,90 391,110 411,110 431,110 0,120 665,120 665,150 595,165 665,180 550,240 575,240 600,240 550,265 575,265 600,265 550,290 575,290 600,290 550,315 575,315 600,315 80,320 5,325 550,340 575,340 600,340 -20,350 5,350 30,350 550,365 575,365 525,390 550,390 575,390 525,415 550,415 500,440 525,440 475,465 500,465 450,490 475,490 425,515 450,515 425,540 310,625 285,635 260,645 235,655 210,660 185,665
DRV8323_CAL: R12.1 U2.31 U4.16 | length 813.7
  Top Layer w8: U4.16 v1@353.33,-96.33
  Top Layer w10: U2.31 -188.25,134.57 cw(c-180.57,134.57) v1(-186,140) ; v1(-186,140) -179.66,146.34 cw(c-166,132.69) -166,152 ccw(c-166,182.35) -144.54,160.89 R12.1
  Sign w10: v1@-186,140 cw(c-135.3,89.3) -135.3,161 15.12,161 15.18,161 cw(c15.46,-115.53) 211.07,79.93 ; 211.09,79.91 328.96,-37.96 cw(c270.92,-96) v1(353,-96)
DRV8323_EN: U2.30 U4.17 | length 742.1
  Top Layer w10: U2.30 cw(c-141.43,88.34) -155.05,101.95 v1(-130,127) ; U4.17 v1(373,-117)
  Sign w10: v1@-130,127 cw(c-88.96,85.96) -88.96,144 15.07,144 cw(c15.23,-12.38) 126.08,97.92 289.13,-65.13 cw(c243.57,-110.69) 308,-110.69 ccw(c336.31,-110.69) 336.31,-139 351,-139 ccw(c351,-117) v1(373,-117)
DRV8323_HA: U2.34 U4.30 | length 925.8
  Top Layer w8: v1@314,7 ccw(c338.47,31.47) 338.47,-3.14 U4.30
  Top Layer w10: U2.34 -247.3,146 v1(-247,146)
  Sign w10: v1@-247,146 cw(c-215,146) -215,178 14.89,178 cw(c15.06,-130.88) 233.57,87.43 233.63,87.37 v1(314,7)
DRV8323_HB: U2.36 U4.31 | length 1000.1
  Top Layer w10: v1(-287,145) -286.67,145 U2.36 ; v1@343,37 ccw(c392.4,86.4) 392.4,16.54 U4.31
  Sign w10: v1(-287,145) -287,176 cw(c-251,176) -251,212 16.11,212 cw(c16.46,-153.85) 275.39,104.61 275.46,104.54 v1(343,37)
DRV8323_HC: U2.38 U4.32 | length 1063.2
  Top Layer w10: U2.38@-326.02,115.92 v1(-326,146) ; v1(374,66) 374.48,65.52 ccw(c445.19,136.23) 445.19,36.23 U4.32
  Sign w10: v1(-326,146) -327,147 -327,177.5 cw(c-257.5,177.5) -257.5,247 15.89,247 cw(c16.28,-179.64) 318.29,121.71 ; 318.31,121.69 v1(374,66)
DRV8323_LA: U2.35 U4.27 | length 990.4
  Top Layer w8: U2.35@-266.99,115.9 v1(-267,164)
  Top Layer w10: v1(373,-23) 382.91,-32.91 ccw(c453.62,37.8) 453.62,-62.2 U4.27
  Sign w10: v1(-267,164) cw(c-236,164) -236,195 15.55,195 cw(c15.8,-141.05) 253.62,96.38 ; 253.64,96.36 v1(373,-23)
DRV8323_LB: U2.37 U4.28 | length 1062.6
  Top Layer w8: v1(-307,164) -306.36,164 U2.37 ; v1(435,-23) ccw(c482.09,24.09) 482.09,-42.51 U4.28
  Sign w10: v1@-308.16,164 v1(-307,164) -307,176 cw(c-253,176) -253,230 16.01,230 cw(c16.38,-165.01) 295.84,114.16 ; 295.87,114.13 433,-23 v1(435,-23)
DRV8323_LC: U2.39 U4.29 | length 1129.1
  Top Layer w8: v1(-347,163) -345.73,161.73 U2.39
  Top Layer w10: v1(492,-23) 569.86,-23 U4.29
  Sign w10: v1(-347,163) -347,178 cw(c-260,178) -260,265 15.8,265 cw(c16.06,-188.73) 337,132 ; 337.03,131.97 v1(492,-23)
DRV8323_nF: R7.2 U2.25 U4.18 | length 783.6
  Top Layer w8: U4.18 392.7,-96.3 v1(393,-96)
  Top Layer w10: U2.25 -131.63,-10.08 ; -131.59,-10.08 ccw(c-131.59,34.59) -99.99,3.01 -93,10 R7.2 -85.5,15 -62.03,38.47 -56.53,38.47 v1(-55,40)
  Sign w10: v1(-55,40) 106.75,40 ; 106.75,40 cw(c106.75,-66.83) 182.29,8.71 235.93,-44.93 cw(c166.53,-114.34) 264.68,-114.14 cw(c166.53,-114.34) 264.68,-114.34 ccw(c306.34,-114.34) 306.34,-156 355,-156 ccw(c355,-118) 393,-118 v1(393,-96)
DRV8323_SOA: U2.23 U4.8 | length 403
  Top Layer w10: U2.23 137.18,-49.45 ccw(c137.18,-5.11) 168.5,-36.5 168.54,-36.46 cw(c201.45,-69.38) 201.45,-22.83 U4.8
DRV8323_SOB: U2.22 U4.9 | length 403
  Top Layer w10: U2.22 140.86,-69.14 ccw(c140.86,-20.86) 175,-55 cw(c205.16,-85.16) 205.16,-42.51 U4.9
DRV8323_SOC: U2.21 U4.10 | length 403
  Top Layer w10: U2.21 146.63,-88.82 ccw(c146.63,-41.63) 180,-75 cw(c210.9,-105.9) 210.9,-62.2 U4.10
DVDD: C5.2 C7.2 R7.1 U2.24 U2.27 U2.29 U2.33 | length 806.8
  Top Layer w8: U2.33 C5.2@-227.62,175.88
  Top Layer w10: C5.2@-227.62,175.88 C5.2 cw(c-188.12,175.88) -188.12,215 -90,215 cw(c-90,178) -53,178 -53,83 v1(-52,82) -76.04,82 ccw(c-76.04,62.97) -89.5,76.43 cw(c-108.25,95.18) -108.25,68.66 -131,68.66 ; U2.24 -92.77,-29.77 ccw(c-92.77,-25) C7.2 ; U2.27 -141.71,29.29 ccw(c-141.71,40) -131,40 -131,68.66 ; U2.29 -131,68.66 ; C7.2@-83,-20 -78.57,-20 v1(-62.78,-4.22) -48.57,10 -44.8,10 R7.1
  Sign w10: v1(-62.78,-4.22) cw(c-62.78,18) -85,18 -85,55 cw(c-58,55) -58,82 v1(-52,82)
  Bottom Layer w10: v1(-52,82) cw(c-73.73,60.27) v1@-50.47,80.35
ENCODER_CLK: U4.13 U5.7 | length 239.3
  Top Layer w10: v1(285,-117) cw(c262.63,-139.37) 286.53,-118.64 cw(c262.63,-139.37) 294.09,-136.06 cw(c262.63,-139.37) 294.27,-139.37 U4.13
  Bottom Layer w10: U5.7 190.55,-63.98 cw(c190.55,-163.98) 261.27,-93.27 v1(285,-117)
ENCODER_CS: U4.12 U5.8 | length 138.2
  Top Layer w10: v1(207,-106) 207,-105.75 211.18,-101.57 U4.12
  Bottom Layer w10: U5.8 189.49,-89.57 190.57,-89.57 cw(c190.57,-106) v1(207,-106) v1@205.93,-106
ENCODER_MISO: U4.14 U5.5 | length 318.1
  Top Layer w10: U4.14@313.98,-160.59 v1(314,-64)
  Bottom Layer w10: U5.5 221.37,-12.8 cw(c221.37,-112.8) 292.08,-42.08 v1(314,-64)
ENCODER_MOSI: U4.15 U5.6 | length 296.6
  Top Layer w10: U4.15 333.76,-160.5 333.76,-117.24 v1(334,-117)
  Bottom Layer w10: U5.6 213.96,-38.39 cw(c213.96,-138.39) 284.68,-67.68 v1(334,-117)
FDCAN_RX: U1.4 U4.33 | length 1041.2
  Top Layer w10: U1.4 -102.58,-522.95 -102.58,-503.74 -101,-502.16 v1(-101,-500) ; v1(519,57) 520.09,55.91 U4.33
  Sign w10: v1(-101,-500) ccw(c-101,-497.59) -99.29,-499.29 -55,-455 ; -55,-455 ccw(c-79.14,-430.86) -45,-430.86 -45,-349 cw(c-1,-349) -1,-305 204.58,-305 ccw(c204.64,-159.29) 307.71,-262.29 489.71,-80.29 ccw(c419,-9.58) 490,-80 ccw(c419,-9.58) 519,-9.58 v1(519,57)
FDCAN_TX: U1.1 U4.34 | length 1060.7
  Top Layer w10: v1(-27,-499) -27,-523.86 U1.1 ; v1@519,83 ccw(c536.86,100.86) 536.86,75.6 U4.34
  Sign w10: v1(-27,-499) -27,-357 cw(c5,-357) 5,-325 207.53,-325 ccw(c207.57,-162.22) 322.71,-277.29 512.71,-87.29 ccw(c442,-16.58) 542,-16.58 542,60 ccw(c519,60) v1(519,83)
NetC3_1: C3.1 U2.3 | length 70.8
  Top Layer w10: C3.1 ccw(c-417.18,108.31) -417.18,48.97 U2.3
NetC4_1: C4.1 U2.1 | length 104.6
  Top Layer w10: C4.1 -444.07,141.9 cw(c-465.98,120) -435,120 ccw(c-410.86,120) -427.93,102.93 -420,95 ; -420,95 ccw(c-403.94,111.06) -403.94,88.35 U2.1
NetC4_2: C4.2 U2.2 | length 81.9
  Top Layer w10: C4.2 -458.77,108.77 -425,75 ; -425,75 ccw(c-409.69,90.31) -409.69,68.66 U2.2
NetC10_1: C10.1 U6.4 | length 55.1
  Top Layer w10: U6.4 151.52,-588.06 152.42,-588.97 C10.1
NetC10_2: C10.2 L1.1 U6.6
NetC11_1: C11.1 U4.5 Y1.3 | length 270.5
  Top Layer w10: C11.1@26.02,138.38 Y1.3 115.76,103.15 ccw(c130.11,117.5) 130.11,97.21 171.79,97.21 cw(c171.79,81) 188,81 188,57 ccw(c208.77,57) 208.77,36.23 U4.5
NetC13_1: C13.1 U4.7 | length 93.9
  Top Layer w10: C13.1@143.2,-10 cw(c159.77,-26.57) 159.77,-3.14 U4.7
NetC17_1: C17.1 U4.20 U7.2
NetC20_1: C20.1 U4.6 Y1.1 | length 268.7
  Top Layer w10: C20.1 cw(c50.58,-8.5) 50.58,16.54 108.31,16.54 ccw(c108.31,55.7) Y1.1 ccw(c186.63,55.7) 186.63,16.54 U4.6
NetC21_2: C21.2 U6.2 | length 75.1
  Top Layer w10: U6.2 100.34,-619.38 ccw(c125.93,-619.38) C21.2
NetC22_2: C22.2 L2.2 U4.21
NetD1_G: D1.G U2.6 | length 245.6
  Top Layer w10: v1(-485,123) -485,9 ccw(c-465.92,9) -465.92,-10.08 U2.6
  Bottom Layer w10: v1(-485,123) -485,119.33 ccw(c-469.06,119.33) D1.G@-469.06,103.39
NetD2_G: D2.G U2.8 | length 247.9
  Top Layer w10: v1@-469.98,-56.98 cw(c-451.78,-75.22) -451.78,-49.45 U2.8
  Sign w10: v1@-471.61,-58.53 ccw(c-501.38,-25.62) v1@-470,-57
  Bottom Layer w10: D2.G -586.18,-53.82 ccw(c-570,-53.82) -570,-70 -483,-70 ccw(c-483,-57) v1(-470,-57)
NetD2_S: D2.S R8.2 U2.9 | length 206.3
  Top Layer w10: R8.2 -550,-60 ccw(c-530,-60) -530,-80 -467.07,-80 ccw(c-467.07,-62.93) -455,-75 ; -455,-75 cw(c-440.86,-89.14) -440.86,-69.14 U2.9
  other v1: -561,-45 -535,-45 -509,-45 -548,-21 -522,-21 -497,-21
NetD3_G: D3.G U2.15 | length 261.8
  Top Layer w10: v1@-290,-175 ccw(c-298.04,-166.96) -287.05,-169.89 ccw(c-298.04,-166.96) -286.67,-166.96 U2.15
  Sign w10: v1(-442,-131) cw(c-435,-131) -435,-124 -320,-124 cw(c-320,-154) -290,-154 v1(-290,-175)
  Bottom Layer w10: v1(-442,-131) -442,-132 -441.78,-132.22 D3.G
NetD4_G: D4.G U2.13 | length 232.4
  Top Layer w10: v1(-327,-150) -326.12,-149.12 -326.12,-116.46 U2.13
  Sign w10: v1@-327,-150 ccw(c-288.37,-188.63) -343,-188.63 -343,-246.64 ccw(c-257.64,-246.64) v1@-318,-307
  Bottom Layer w10: D4.G -324.94,-290.25 ccw(c-301.25,-290.25) v1(-318,-307)
NetD4_S: D4.S R9.2 U2.12 | length 191.7
  Top Layer w10: U2.12 -345.73,-130.86 cw(c-400.94,-130.86) -361.93,-169.93 -375.98,-183.98 ccw(c-346.96,-213) -388,-213 -388,-230 ccw(c-366.7,-230) -366.64,-251.3 R9.2
  other v1: -301,-252 -321,-240 -301,-227 -321,-214 -301,-202
NetD5_G: D5.G U2.16 | length 23.8
  Top Layer w10: U2.16 -266.91,-116.46 -266.91,-139.31 v1(-266.32,-139.9)
NetD6_G: D6.G U2.18 | length 93.7
  Top Layer w10: v1(-241,-202) ccw(c-241,-188.62) -227.62,-188.62 U2.18
  Bottom Layer w10: D6.G@-241.06,-201.61 -241.06,-201.94 v1(-241,-202)
NetD6_S: D6.S R10.2 U2.19 | length 182.2
  Top Layer w10: R10.2 -206.3,-251.3 ccw(c-206.3,-235) -190,-235 -190,-194.13 ccw(c-224.12,-194.13) -199.99,-170.01 cw(c-180.83,-150.85) -207.93,-150.85 U2.19
  other v1: -271,-277 -251,-266 -271,-252 -251,-240 -270,-225
NetLED1_1: LED1.1 R5.2 | length 86.1
  Top Layer w10: R5.2 -264,330 ccw(c-264,360) LED1.1
NetLED2_1: LED2.1 R20.2 | length 81.6
  Top Layer w10: LED2.1 255.43,378 R20.2
NetR11_2: R11.2 U6.3 | length 100.7
  Top Layer w10: U6.3 125.93,-610.17 ccw(c139.83,-610.17) 130,-620 ; 130,-620 ccw(c138.57,-611.43) 138.57,-623.55 159.51,-623.55 cw(c159.51,-644.97) R11.2
NetR13_1: R13.1 U4.45 | length 63.2
  Top Layer w10: U4.45 353.33,232.77 cw(c359.03,232.77) R13.1
NetR16_1: R16.1 R18.2 R19.2 | length 181.5
  Top Layer w10: R19.2 cw(c22.26,-571.8) 0,-571.8 0,-511.03 cw(c22.26,-511.03) R18.2 R16.1
NetR18_1: R18.1 U6.1 | length 92.3
  Top Layer w10: R18.1 56.72,-536.97 cw(c56.72,-555) 74.75,-555 U6.1
PGND: C1.1 C2.1 C8.1 C9.1 C14.1 C15.1 C18.1 C19.1 C21.1 C25.1 C26.1 C27.1 C28.1 C29.1 C30.1 H1.3 H1.4 H1.7 H1.8 H2.3 H2.4 H2.8 R3.2 R4.2 R8.1 R9.1 R10.1 R17.2 R19.1 U2.10 U2.11 U2.20 U2.40 U2.41 U3.2 U6.5 | length 810.3
  Top Layer w10: R8.1 -550,-120 cw(c-530,-120) -530,-100 -462.07,-100 ccw(c-462.07,-82.93) -450,-95 ; R9.1 -427.3,-251.3 ccw(c-427.3,-229) -405,-229.09 -405,-208 cw(c-356.72,-208) -390.88,-173.88 -377.72,-160.72 ccw(c-407.44,-131) -365.41,-131.06 ccw(c-407.44,-131) -365.41,-131 U2.11 ; -450,-95 cw(c-435.09,-109.91) -435.09,-88.82 U2.10 ; C8.1 cw(c-208.2,-468.2) -195,-468.2 U3.2 ; U2.20 -188.25,-145.08 ccw(c-162.5,-145.08) -180.71,-163.29 cw(c-206.56,-189.14) -170,-189.14 -170,-235 ccw(c-153.7,-235) -153.7,-251.3 R10.1 ; R4.2@-40.8,-377 v1(-4,-377) ; R3.2@25,176.2 25.1,176.3 25.1,304.9 v1(25,305)
  other v1: -5,-695 20,-695 45,-695 70,-695 95,-695 120,-695 -5,-670 20,-670 45,-670 70,-670 95,-670 120,-670 -260,-645 -195,-645 -5,-645 45,-645 -260,-620 -195,-620 -260,-595 -195,-595 -260,-570 -195,-570 -170,-570 -260,-545 -260,-520 -260,-495 -260,-470 -260,-445 190,-410 210,-410 190,-365 210,-365 -44.39,-274.87 -25,-275 -5,-275 15,-275 35,-275 -45,-255 -25,-255 -5,-255 15,-255 35,-255 -520,-250 -500,-250 -44.39,-234.87 -25,-235 -5,-235 15,-235 35,-235 -660,-230 -640,-230 -620,-230 -520,-230 -500,-230 -45,-215 -25,-215 -5,-215 15,-215 35,-215 -660,-210 -640,-210 -620,-210 -600,-210 -580,-210 -560,-210 -540,-210 -520,-210 -500,-210 -480,-210 -44.39,-194.87 -25,-195 -5,-195 15,-195 35,-195 165,-195 185,-195 205,-195 225,-195 -660,-190 -640,-190 -620,-190 -600,-190 -580,-190 -560,-190 -540,-190 -520,-190 -500,-190 -480,-190 -25,-175 -5,-175 15,-175 35,-175 165,-175 185,-175 205,-175 225,-175 -660,-170 -640,-170 -620,-170 -600,-170 -500,-170 -480,-170 -5,-155 15,-155 35,-155 185,-155 205,-155 225,-155 -680,-150 -660,-150 -640,-150 -620,-150 -600,-150 -500,-150 -480,-150 -680,-130 -660,-130 -640,-130 -620,-130 -600,-130 -500,-130 -480,-130 -300,20 -280,20 -260,20 -240,20 -220,20 -200,20 -300,40 -280,40 -260,40 -240,40 -220,40 -200,40 -300,60 -280,60 -260,60 -240,60 -220,60 -200,60 -605,250 -585,250 -565,250 -605,270 -585,270 -565,270 -605,290 -585,290 -565,290 -605,310 -585,310 -565,310 -605,330 -585,330 -565,330 -605,350 -585,350 -565,350
SHA: D1.S D2.D pad.14@-595,165 U2.7 | length 161
  Top Layer w10: v1(-470,-31) -468.85,-29.85 -393.05,-29.85 U2.7
  Bottom Layer w10: v1(-470,-31) -470,49.94 cw(c-466.79,49.94) D1.S@-469.06,52.21
  other v1: -635,125 -610,125 -585,125 -635,150 -610,150 -585,150 -635,175 -610,175 -585,175 -635,200 -610,200 -585,200
SHB: D3.S D4.D pad.14@-396,-360 U2.14 | length 122.3
  Top Layer w10: v1(-320,-175) -317.64,-174.02 -315.8,-173.26 -314.39,-171.85 -314.12,-171.59 ccw(c-337.96,-150.84) -306.36,-150.84 U2.14
  Bottom Layer w10: -365,-157.13 -365,-165 ccw(c-357,-165) -357,-173 -355,-175 v1(-320,-175)
  other v1: -431,-400 -406,-400 -381,-400 -356,-400 -431,-375 -406,-375 -381,-375 -356,-375 -431,-350 -406,-350 -381,-350 -356,-350 -431,-325 -406,-325 -381,-325 -356,-325
SHC: D5.S D6.D pad.14@-227,-360 U2.17 | length 51.5
  Top Layer w8: v1(-248,-167) -246.62,-165.62 -246.62,-117.06 U2.17
  other v1: -266,-400 -241,-400 -216,-400 -191,-400 -266,-375 -241,-375 -216,-375 -191,-375 -266,-350 -241,-350 -216,-350 -191,-350 -266,-325 -241,-325 -216,-325 -191,-325
STATE_LED: R20.1 U4.46 | length 169.8
  Top Layer w10: R20.1 cw(c309,305.16) 333.64,305.16 U4.46
SW_Bit0: SW1.1 U4.44 | length 320.3
  Top Layer w10: v1(373,130) U4.44
  Sign w10: v1(150,269) 192.58,269 cw(c192.58,169) 263.29,239.71 v1(373,130)
SW_Bit1: SW1.2 U4.43 | length 322.6
  Top Layer w10: SW1.2@148,320 ccw(c150.41,322.41) v1(150.41,319) ; v1@385,221 cw(c366.4,202.4) 392.7,202.4 U4.43
  Sign w10: v1(150.41,319) 245.58,319 cw(c245.58,219) 316.29,289.71 v1(385,221)
SW_Bit2: SW1.3 U4.42 | length 379.2
  Top Layer w10: v1(150,354) SW1.3@150,362 ; v1(412,241) 412,174.4 U4.42
  Sign w10: v1(150,354) 253.65,354 cw(c253.72,244.67) 331.04,321.96 ; 331.07,321.93 v1(412,241)
SWCLK: CN1.3 R2.1 U4.38 | length 717.1
  Top Layer w10: CN1.3 25.2,523.9 R2.1 25,446.18 25,429 ccw(c50,429) 50,404 312.58,404 cw(c312.58,304) 383.29,374.71 461.83,296.17 cw(c391.12,225.46) 491.12,225.46 U4.38
SWDIO: CN1.4 R1.1 U4.37 | length 685.8
  Top Layer w10: CN1.4 73.82,446.82 cw(c73,446.82) R1.1 73,436 ccw(c87,436) 87,422 319.58,422 cw(c319.58,322) 390.29,392.71 481.52,301.48 cw(c410.81,230.77) 510.81,230.77 U4.37
VBUS: C1.2 C2.2 C3.2 C14.2 C15.2 C25.2 C26.2 C27.2 C28.2 C29.2 C30.2 D1.D D3.D D5.D H1.1 H1.2 H2.1 H2.2 R11.1 R15.2 U2.4 U2.5 U6.7 | length 331.5
  Top Layer w10: v1(175,-675) ccw(c175,-616.83) 188.26,-673.47 ccw(c175,-616.83) 204.82,-666.78 ccw(c175,-616.83) 216.13,-657.96 R11.1
  Bottom Layer w10: H1.1 147.16,-607.8 ccw(c242.2,-607.8) v1(175,-675)
  other v1: 89,-417 89,-362
  other v2: -415,20
pads on no net: U2.28 U3.4 U4.2 U4.3 U4.4 U4.22 U4.26 U4.39 U4.40 U4.41 U5.1 U5.2 U5.3 U5.10 U5.13 U5.14 U5.15 U5.16 U6.8

## Polygon pours and split planes (outlines as drawn)
DGND on Bottom Layer "DGND_L04_P047" (solid, remove dead copper, pour order 47): -170,-140 -170,273.61 62.57,273.61 62.57,704.03 99.63,700.63 183.31,683.75 259.8,658.97 343.48,619.11 398.06,586.42 462.71,535.79 520.53,479.41 565.06,422.66 589.48,387.47 611.39,353.35 637.6,304.51 655.92,266.08 672.8,222.27 684.29,181.33 687.52,161.94 687.52,138.59 683.57,118.48 673.87,105.55 656.28,93.34 632.57,77.9 613.9,58.87 600.25,38.76 593.43,12.9 593.79,-8.65 599.89,-31.27 609.59,-49.59 618.93,-63.95 631.5,-78.32 647.3,-89.45 665.97,-98.07 678.54,-112.8 686.08,-132.55 686.96,-154.97 676.95,-199.29 658.36,-252.67 629.29,-318.44 592.6,-380.39 544.94,-448.54 468.21,-525.74 401.02,-579.6 345.73,-620.58 284.73,-647.27 250.07,-660.59 250.07,-140
SHA on Bottom Layer "SHA_L04_P002" (solid, remove dead copper, pour order 2): -640,230 -660,210 -660,120 -600,60 -600,5 -440,5 -440,85 -495,85 -495,125 -560,125 -560,230
PGND on Bottom Layer "Bottom Layer-PGND" (solid, remove dead copper, pour order 46): -303.2,-643.93 -286.34,-651.28 -236.34,-670.89 -191.34,-685.89 -135.53,-698.27 -85.97,-705.14 -40.59,-708.72 -2.97,-710.81 51.07,-709.02 91.97,-704.54 130.49,-698.27 168.41,-690.15 213.66,-675.89 227.97,-669.86 238.66,-662.41 238.66,-210 385,-210 385,-145 238.66,-145 -173.84,-145 -173.84,370 46.16,370 46.16,703.41 23.89,705.45 -58.35,703.3 -140.59,691.8 -214.93,672.77 -297.17,642.6 -358.94,609.92 -429.69,561.08 -484.28,516.55 -530.6,469.51 -576.57,410.61 -608.53,363.56 -631.52,318.67 -654.86,267.68 -675.69,209.5 -688.26,162.81 -690.41,142.34 -689.7,126.18 -683.93,109.9 -674.57,100.79 -662.26,92.66 -650.19,86.26 -629.75,73.94 -614.73,57.94 -606.6,40.2 -603.65,20.01 -600.45,-1.42 -602.17,-22.35 -608.57,-45.99 -619.9,-60.27 -635.66,-73.82 -651.42,-82.68 -662.26,-89.58 -674.08,-98.69 -683.93,-108.05 -690.83,-123.32 -693.29,-140.06 -693.54,-156.32 -688.36,-180.21 -678.51,-216.66 -670.88,-233.16 -661.52,-244.73 -650.68,-248.42 -640.34,-248.18 -628.27,-244.24 -614.73,-238.33 -594.78,-230.69 -578.53,-227.24 -564.74,-228.48 -547.25,-234.14 -537.89,-242.51 -524.84,-262.22 -513.02,-284.63 -481,-346.19 -477.56,-363.93 -481.99,-379.93 -489.62,-394.22 -505.63,-405.05 -531.24,-424.26 -537.15,-434.36 -541.09,-444.46 -539.62,-460.46 -532.23,-474.99 -515.24,-491.99 -469.68,-535.33 -421.16,-573.26 -367.47,-609.46
VBUS on Bottom Layer "Bottom Layer-VBUS" (solid, remove dead copper, pour order 22): -455,-110 -157,-110 -157,-4 -320,-4 -320,110 -365,155 -365,176.34 -341.34,200 -170,200 -130,160 410,160 450,120 450,-160 385,-225 60,-225 60,-470 175,-470 175,-350 440,-350 560,-230 560,180 470,270 25,270 -65,360 -65,475 -435,475 -435,-5 -455,-5
NetD6_S on Bottom Layer "NETD6_S_L04_P009" (solid, remove dead copper, pour order 9): -280,-220 -280,-290 -225,-290 -225,-220
NetD4_S on Bottom Layer "NETD4_S_L04_P008" (solid, remove dead copper, pour order 8): -345,-190 -345,-265 -290,-265 -290,-190
SHC on Bottom Layer "SHC_L04_P007" (solid, remove dead copper, pour order 7): -260,-120 -260,-185 -215,-185 -215,-300 -270,-300 -290,-320 -290,-400 -270,-420 -185,-420 -175,-410 -175,-360 -175,-355 -110,-290 -110,-170 -160,-120
SHB on Bottom Layer "SHB_L04_P006" (solid, remove dead copper, pour order 6): -425,-120 -425,-190 -460,-190 -460,-400 -440,-420 -355,-420 -335,-400 -335,-310 -355,-290 -355,-120
NetD2_S on Bottom Layer "NETD2_S_L04_P003" (solid, remove dead copper, pour order 3): -570,-5 -570,-55 -486,-55 -486,-5
DGND on Top Layer "Top Layer-DGND 1" (solid, remove dead copper, pour order 51): -340,-125 250,-125 250,-661.7 284.67,-648.38 345.67,-621.69 400.95,-580.7 468.15,-526.85 544.87,-449.65 592.53,-381.5 629.23,-319.54 658.3,-253.78 676.88,-200.4 686.89,-156.08 686.02,-133.66 678.48,-113.9 665.91,-99.18 647.23,-90.56 631.43,-79.43 618.86,-65.06 609.52,-50.7 599.83,-32.38 593.72,-9.76 593.36,11.79 600.19,37.65 613.83,57.76 632.51,76.79 656.21,92.24 673.81,104.45 683.5,117.38 687.45,137.49 687.45,160.83 684.22,180.22 672.73,221.16 655.85,264.98 637.54,303.4 611.32,352.24 589.41,386.36 564.99,421.56 520.46,478.3 462.64,534.68 398,585.32 343.41,618 259.74,657.86 183.24,682.64 99.56,699.52 80,701.32 25.23,706.34 -57.01,704.19 -139.25,692.7 -213.59,673.66 -295.83,643.5 -340,620.13
PGND on Top Layer "GND-PGND" (solid, remove dead copper, pour order 50): -357.6,610.82 -357.6,580 -357.6,-140 240,-140 240,-661.51 229.3,-668.97 215,-675 169.75,-689.26 131.83,-697.38 93.31,-703.65 52.41,-708.13 -1.63,-709.92 -39.25,-707.83 -84.63,-704.25 -134.19,-697.38 -190,-685 -235,-670 -285,-650.39 -301.86,-643.04 -366.13,-608.57 -419.82,-572.36 -468.34,-534.44 -513.9,-491.09 -530.89,-474.1 -538.28,-459.57 -539.76,-443.56 -535.82,-433.47 -529.91,-423.37 -504.29,-404.16 -488.28,-393.32 -480.65,-379.04 -476.22,-363.03 -479.67,-345.3 -511.68,-283.73 -523.5,-261.32 -536.55,-241.62 -545.91,-233.25 -563.4,-227.58 -577.19,-226.35 -593.44,-229.8 -613.39,-237.44 -626.94,-243.35 -639,-247.29 -649.35,-247.53 -660.18,-243.84 -669.54,-232.26 -677.18,-215.76 -687.03,-179.31 -692.2,-155.43 -691.95,-139.17 -689.49,-122.43 -682.59,-107.16 -672.74,-97.8 -660.92,-88.69 -650.09,-81.79 -634.32,-72.93 -618.56,-59.38 -607.23,-45.1 -600.83,-21.46 -599.11,-0.52 -602.31,20.9 -605.26,41.1 -613.39,58.83 -628.41,74.84 -648.85,87.15 -660.92,93.55 -673.24,101.68 -682.59,110.79 -688.36,127.07 -689.08,143.23 -686.92,163.7 -674.35,210.39 -653.52,268.57 -630.18,319.56 -607.2,364.45 -575.23,411.5 -529.27,470.4 -482.94,517.44 -428.35,561.97
PGND on Top Layer "PGND_L01_P043" (solid, remove dead copper, pour order 43): -685,-115 -430,-115 -430,-285 -510,-285 -531.54,-250.97 -538.77,-241.33 -548.94,-233.84 -564.2,-227.95 -579.45,-227.68 -600.87,-232.23 -615.59,-239.19 -633.79,-245.35 -649.32,-247.22 -660.03,-243.21 -669.39,-232.77 -675.28,-217.24 -684.92,-178.7 -690.81,-155.14 -691.88,-135.33 -685.72,-116.06
PGND on Top Layer "PGND_L01_P036" (solid, remove dead copper, pour order 36): -270,-435 -270,-655 -235,-670 -190,-685 -134.19,-697.38 -84.63,-704.25 -39.25,-707.83 -1.63,-709.92 52.41,-708.13 93.31,-703.65 131.83,-697.38 169.75,-689.26 215,-675 229.3,-668.97 240,-661.51 240,-140 -145,-140 -145,-435
3V3 on Top Layer "3V3_L01_P035" (solid, remove dead copper, pour order 35): -175,-585 -175,-675 -125,-675 -95,-645 -95,-620 -120,-620 -120,-585
DGND on Top Layer "DGND_L01_P034" (solid, remove dead copper, pour order 34): 485,-130 500,-130 500,-205 525,-230 525,-285 520,-290 490,-290 475,-275 475,-205 485,-195
3V3 on Top Layer "3V3_L01_P033" (solid, remove dead copper, pour order 33): 505,-130 505,-200 535,-230 535,-285 515,-305 515,-375 430,-375 430,-495 470,-495 470,-455 510,-455 535,-430 535,-330 565,-300 565,-220 520,-175 520,-130
NetC22_2 on Top Layer "NETC22_2_L01_P032" (solid, remove dead copper, pour order 32): 445,-130 445,-245 430,-260 430,-365 505,-365 505,-300 485,-300 465,-280 465,-205 460,-200 460,-130
DGND on Top Layer "Top Layer-DGND" (solid, remove dead copper, pour order 31): 340,-290 350,-300 350,-485 385,-485 385,-450 380,-445 380,-250 420,-210 420,-130 405,-130 405,-200 340,-265
NetC17_1 on Top Layer "NETC17_1_L01_P029" (solid, remove dead copper, pour order 29): 425,-130 440,-130 440,-235 420,-255 420,-440 385,-440 385,-255 425,-215
5V on Top Layer "5V_L01_P027" (solid, remove dead copper, pour order 27): 170,-430 170,-485 340,-485 340,-310 230,-310 230,-430
PGND on Top Layer "PGND_L01_P026" (solid, remove dead copper, pour order 26): 120,-360 120,-455 145,-455 145,-520 160,-520 160,-420 220,-420 220,-310 170,-310 170,-360
NetC10_2 on Top Layer "NETC10_2_L01_P025" (solid, remove dead copper, pour order 25): 115,-465 115,-550 170,-550 170,-570 230,-570 230,-605 275,-605 275,-500 170,-500 170,-525 135,-525 135,-465
VBUS on Top Layer "VBUS_L01_P013" (solid, remove dead copper, pour order 13): 65,-325 65,-435 90,-460 90,-525 110,-525 110,-325
NetD6_S on Top Layer "NETD6_S_L01_P011" (solid, remove dead copper, pour order 11): -280,-215 -280,-285 -210,-285 -210,-215
NetD4_S on Top Layer "NETD4_S_L01_P010" (solid, remove dead copper, pour order 10): -365,-285 -290,-285 -290,-191.79 -365,-191.79
NetD2_S on Top Layer "NETD2_S_L01_P004" (solid, remove dead copper, pour order 4): -585,5 -585,-55 -485,-55 -485,-5 -485,5
VBUS on Top Layer "VBUS_L01_P001" (solid, remove dead copper, pour order 1): -470,40 -470,5 -380,5 -380,35 -445,35 -450,40
DGND on GND "DGND_L02_P041" (solid, remove dead copper, pour order 41): -157.5,-125 -157.5,272.5 62.5,272.5 62.5,702.92 99.56,699.52 183.24,682.64 259.74,657.86 343.41,618 398,585.32 462.64,534.68 520.46,478.3 564.99,421.56 589.41,386.36 611.32,352.24 637.54,303.4 655.85,264.98 672.73,221.16 684.22,180.22 687.45,160.83 687.45,137.49 683.5,117.38 673.81,104.45 656.21,92.24 632.51,76.79 613.83,57.76 600.19,37.65 593.36,11.79 593.72,-9.76 599.83,-32.38 609.52,-50.7 618.86,-65.06 631.43,-79.43 647.23,-90.56 665.91,-99.18 678.48,-113.9 686.02,-133.66 686.89,-156.08 676.88,-200.4 658.3,-253.78 629.23,-319.54 592.53,-381.5 544.87,-449.65 468.15,-526.85 400.95,-580.7 345.67,-621.69 284.67,-648.38 250,-661.7 250,-125
PGND on GND "GND-PGND" (solid, remove dead copper, pour order 42): -301.86,-643.04 -285,-650.39 -235,-670 -190,-685 -134.19,-697.38 -84.63,-704.25 -39.25,-707.83 -1.63,-709.92 52.41,-708.13 93.31,-703.65 131.83,-697.38 169.75,-689.26 215,-675 229.3,-668.97 240,-661.51 240,-140 -172.5,-140 -172.5,280 cw(c-165,280) -165,287.5 47.5,287.5 47.5,704.3 25.23,706.34 -57.01,704.19 -139.25,692.7 -213.59,673.66 -295.83,643.5 -357.6,610.82 -428.35,561.97 -482.94,517.44 -529.27,470.4 -575.23,411.5 -607.2,364.45 -630.18,319.56 -653.52,268.57 -674.35,210.39 -686.92,163.7 -689.08,143.23 -688.36,127.07 -682.59,110.79 -673.24,101.68 -660.92,93.55 -648.85,87.15 -628.41,74.84 -613.39,58.83 -605.26,41.1 -602.31,20.9 -599.11,-0.52 -600.83,-21.46 -607.23,-45.1 -618.56,-59.38 -634.32,-72.93 -650.09,-81.79 -660.92,-88.69 -672.74,-97.8 -682.59,-107.16 -689.49,-122.43 -691.95,-139.17 -692.2,-155.43 -687.03,-179.31 -677.18,-215.76 -669.54,-232.26 -660.18,-243.84 -649.35,-247.53 -639,-247.29 -626.94,-243.35 -613.39,-237.44 -593.44,-229.8 -577.19,-226.35 -563.4,-227.58 -545.91,-233.25 -536.55,-241.62 -523.5,-261.32 -511.68,-283.73 -479.67,-345.3 -476.22,-363.03 -480.65,-379.04 -488.28,-393.32 -504.29,-404.16 -529.91,-423.37 -535.82,-433.47 -539.76,-443.56 -538.28,-459.57 -530.89,-474.1 -513.9,-491.09 -468.34,-534.44 -419.82,-572.36 -366.13,-608.57
DGND on Sign "Sign-DGND" (solid, remove dead copper, pour order 48): 247.5,-607.5 247.5,-662.66 284.67,-648.38 345.67,-621.69 400.95,-580.7 468.15,-526.85 544.87,-449.65 592.53,-381.5 629.23,-319.54 658.3,-253.78 676.88,-200.4 686.89,-156.08 686.02,-133.66 678.48,-113.9 665.91,-99.18 647.23,-90.56 631.43,-79.43 618.86,-65.06 609.52,-50.7 599.83,-32.38 593.72,-9.76 593.36,11.79 600.19,37.65 613.83,57.76 632.51,76.79 656.21,92.24 673.81,104.45 683.5,117.38 687.45,137.49 687.45,160.83 684.22,180.22 672.73,221.16 655.85,264.98 637.54,303.4 611.32,352.24 589.41,386.36 564.99,421.56 520.46,478.3 462.64,534.68 398,585.32 343.41,618 259.74,657.86 183.24,682.64 99.56,699.52 25.23,706.34 -57.01,704.19 -139.25,692.7 -213.59,673.66 -295.83,643.5 -357.6,610.82 -428.35,561.97 -482.94,517.44 -529.27,470.4 -575.23,411.5 -378.98,410.86 -380.14,177.6 -122.5,182.65 -122.5,-130 247.5,-130 247.5,-317.5 -112.5,-317.5 -112.5,-607.5
PGND on Sign "Sign-PGND" (solid, remove dead copper, pour order 44): -127.5,-615 -127.5,-310 cw(c-120,-310) -120,-302.5 235,-302.5 235,-140 -137.5,-140 -137.5,167.35 -392.55,162.35 -390.99,394.74 -589.18,394.74 -615.18,351.69 -639,303.4 -657.17,258.95 -674.35,210.39 -686.92,163.7 -689.08,143.23 -688.36,127.07 -682.59,110.79 -673.24,101.68 -660.92,93.55 -648.85,87.15 -628.41,74.84 -613.39,58.83 -605.26,41.1 -602.31,20.9 -599.11,-0.52 -600.83,-21.46 -607.23,-45.1 -618.56,-59.38 -634.32,-72.93 -650.09,-81.79 -660.92,-88.69 -672.74,-97.8 -682.59,-107.16 -689.49,-122.43 -691.95,-139.17 -692.2,-155.43 -687.03,-179.31 -677.18,-215.76 -669.54,-232.26 -660.18,-243.84 -649.35,-247.53 -639,-247.29 -626.94,-243.35 -613.39,-237.44 -593.44,-229.8 -577.19,-226.35 -563.4,-227.58 -545.91,-233.25 -536.55,-241.62 -523.5,-261.32 -511.68,-283.73 -479.67,-345.3 -476.22,-363.03 -480.65,-379.04 -488.28,-393.32 -504.29,-404.16 -529.91,-423.37 -535.82,-433.47 -539.76,-443.56 -538.28,-459.57 -530.89,-474.1 -513.9,-491.09 -468.34,-534.44 -419.82,-572.36 -366.13,-608.57 -301.86,-643.04 -240,-670 -165.9,-693.71 -71.83,-708.82 22.08,-711.28 103.57,-701.27 194.12,-683.16 235,-667.46 235,-622.5 -120,-622.5 cw(c-120,-615)

## Other copper
Top Layer:
  pour cut-out: 520,-130 540,-110 540,-70 475,-70 405,0 265,0 265,-105 285,-125 285,-250 355,-250 405,-200 405,-130
  pour cut-out: -390,100 -390,-115 -160,-115 -160,100

## Silkscreen, mask and mechanical layers (free items; w line width, h text height)
Top Overlay:
  drawing of 32 lines, arcs and shapes, not listed
  text "A" at -615,240 h60
  text "B" at -445,-495 h60
  text "C" at -295,-495 h60
Bottom Overlay:
  drawing of 4 lines, arcs and shapes, not listed
  text "ZQ Motor" at 548,236.28 h60
Mechanical 1:
  circle w10: c-351.07,-557.07 r44.12
  circle w10: c351.07,557.07 r44.12
  lines w10: -703.91,-162.57 ccw(c0,0) -682.28,-237.53 ccw(c-645.1,-224.58) -630.03,-260.96 -589.18,-244.04 cw(c-574.11,-280.41) -540.02,-260.73 -495.81,-337.31 cw(c-529.9,-356.99) -505.93,-388.23 -541.01,-415.14 ccw(c-517.04,-446.38) -546.84,-472.1 ccw(c0,0) 703.91,-162.57 ccw(c627.19,-144.85) 658.08,-72.43 cw(c688.98,0) 657.17,72.03 ccw(c625.35,144.06) 702.08,161.73 ccw(c0,0) -702.08,161.73 ccw(c-625.35,144.06) -657.17,72.03 cw(c-688.98,0) -658.08,-72.43 ccw(c-627.19,-144.85) -703.91,-162.57

## Text inside footprints (layer, text, board x,y; h text height)
SW1: Top Overlay "3" at 75.15,369 h19.68 r270; Top Overlay "2" at 75.15,314 h19.68 r270; Top Overlay "1" at 75.15,264 h19.68 r270; Top Overlay "ON" at -49.99,388.84 h19.68 r180; Top Overlay "ON" at -49.99,338.84 h19.68 r180; Top Overlay "ON" at -49.99,288.84 h19.68 r180